# Altium PCB alpha_2.1.PcbDoc (part 1 of 2)
Units mil, origin at the board's own origin, x right, y up, seen from the top; angles counter-clockwise.
Board outline 3200 x 2100 mil, 6 copper layers (Component Side, Ground Plane (GND), Inner Layer 1, Inner Layer 2, Power Plane (VCC), Solder Side), stack 51.068 mil thick; 181 components, 149 nets, 637 pads, 303 vias.
Unrouted connection lines stored in the file: 8.
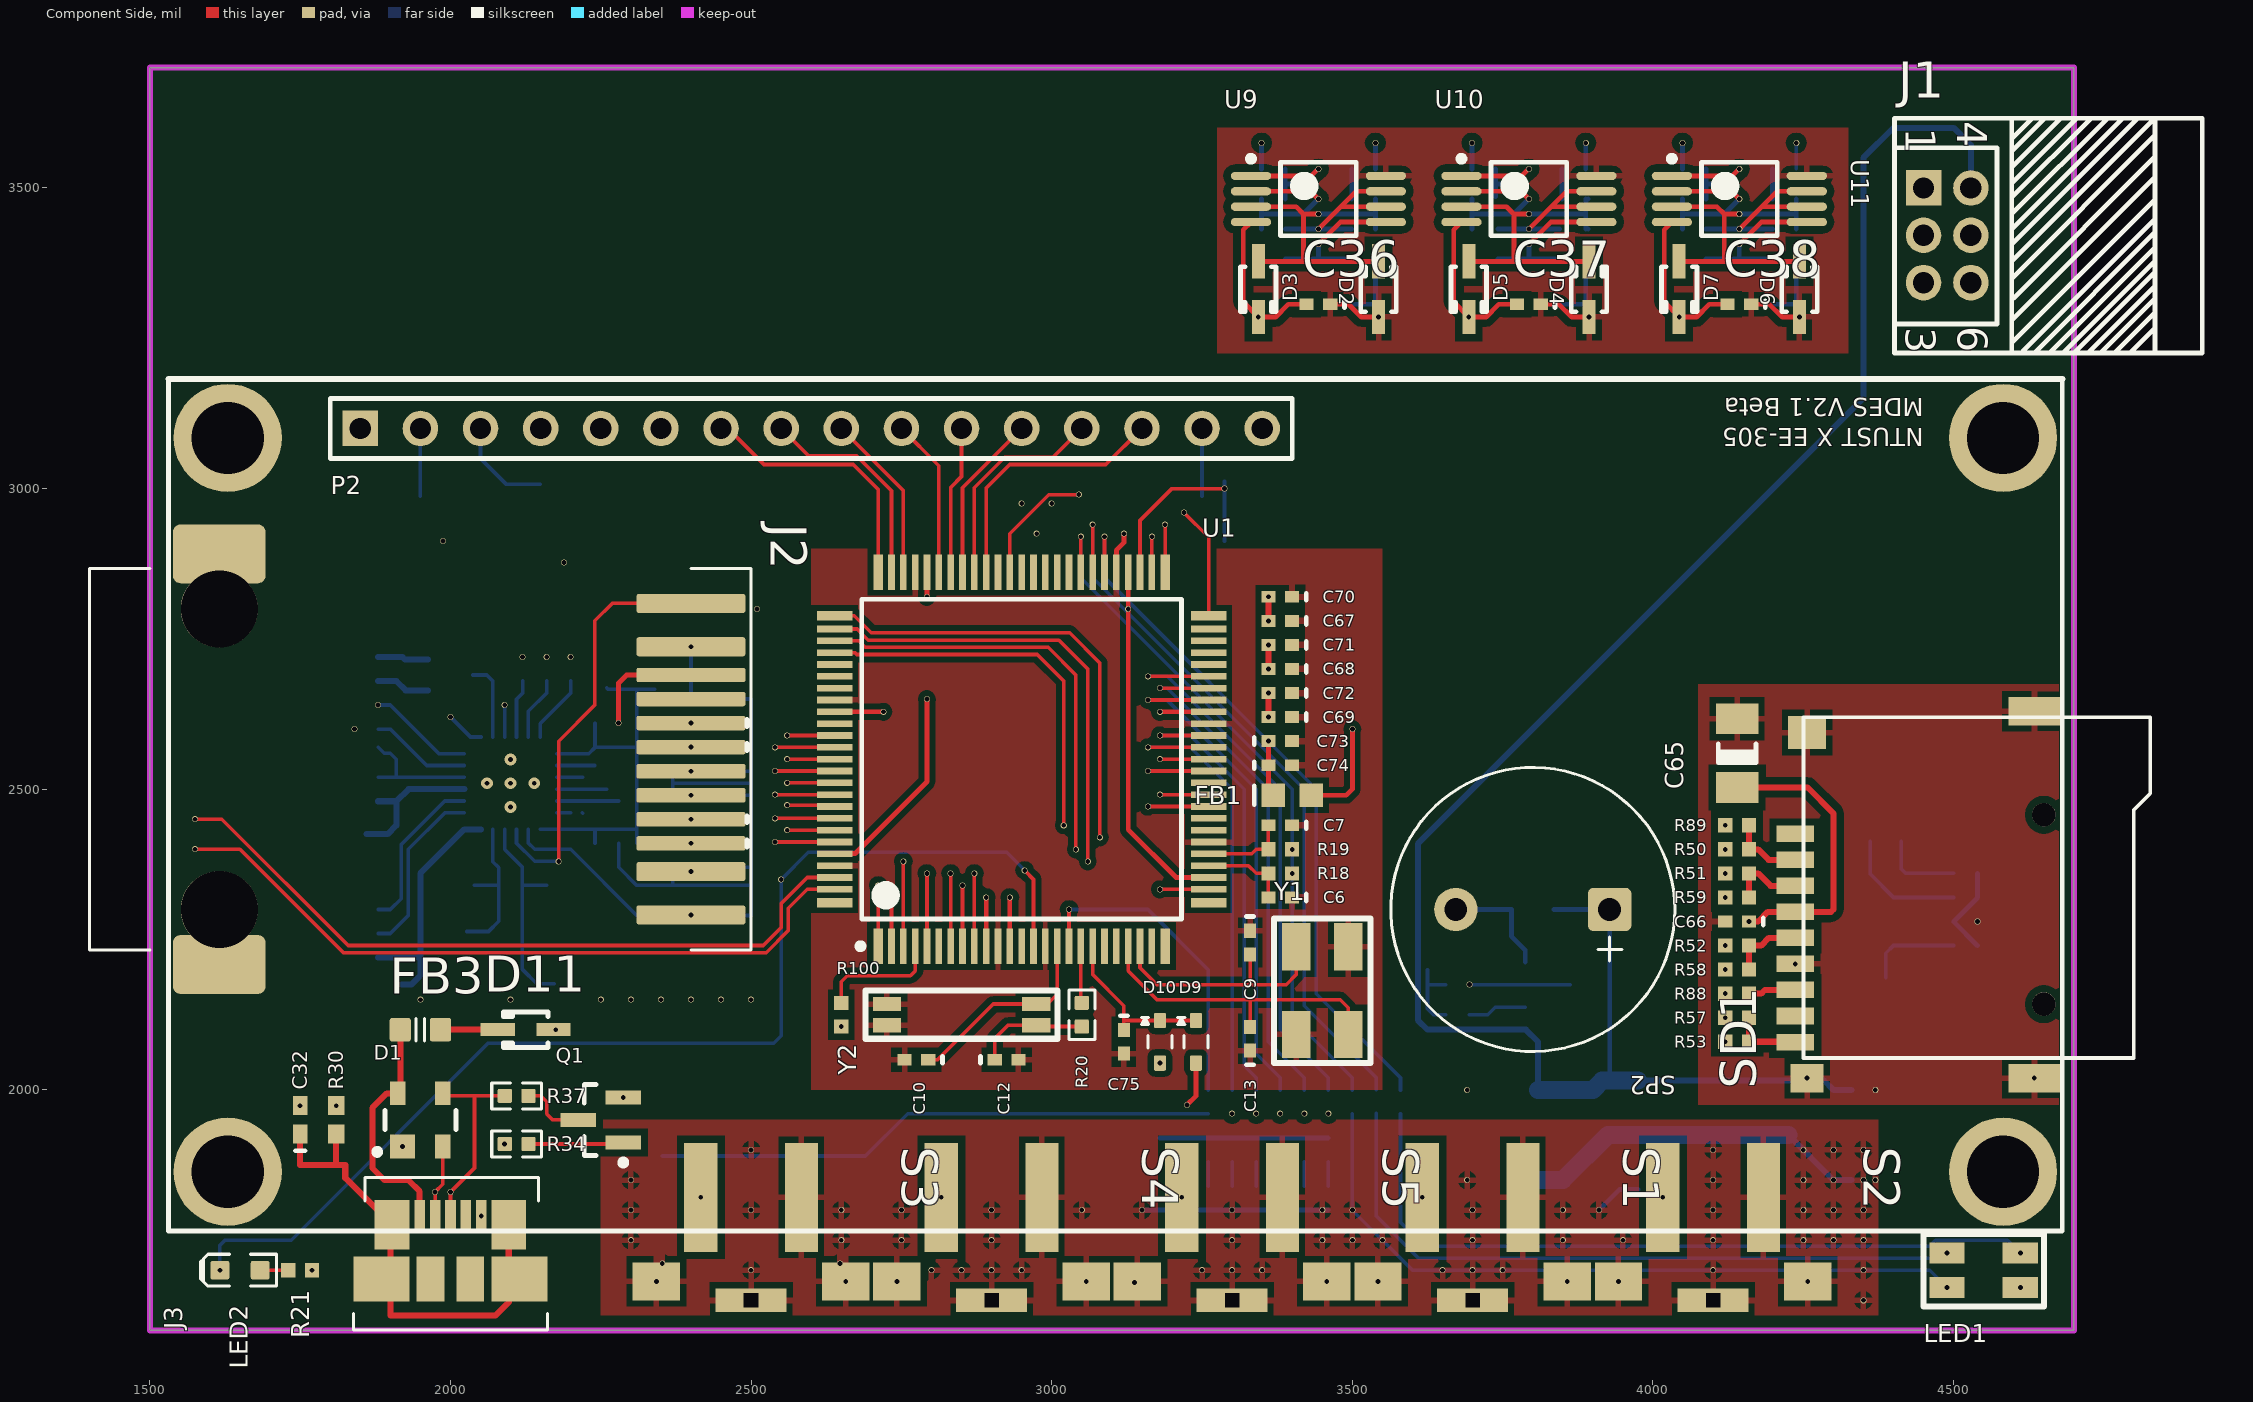
[diagram p0: Component Side view]
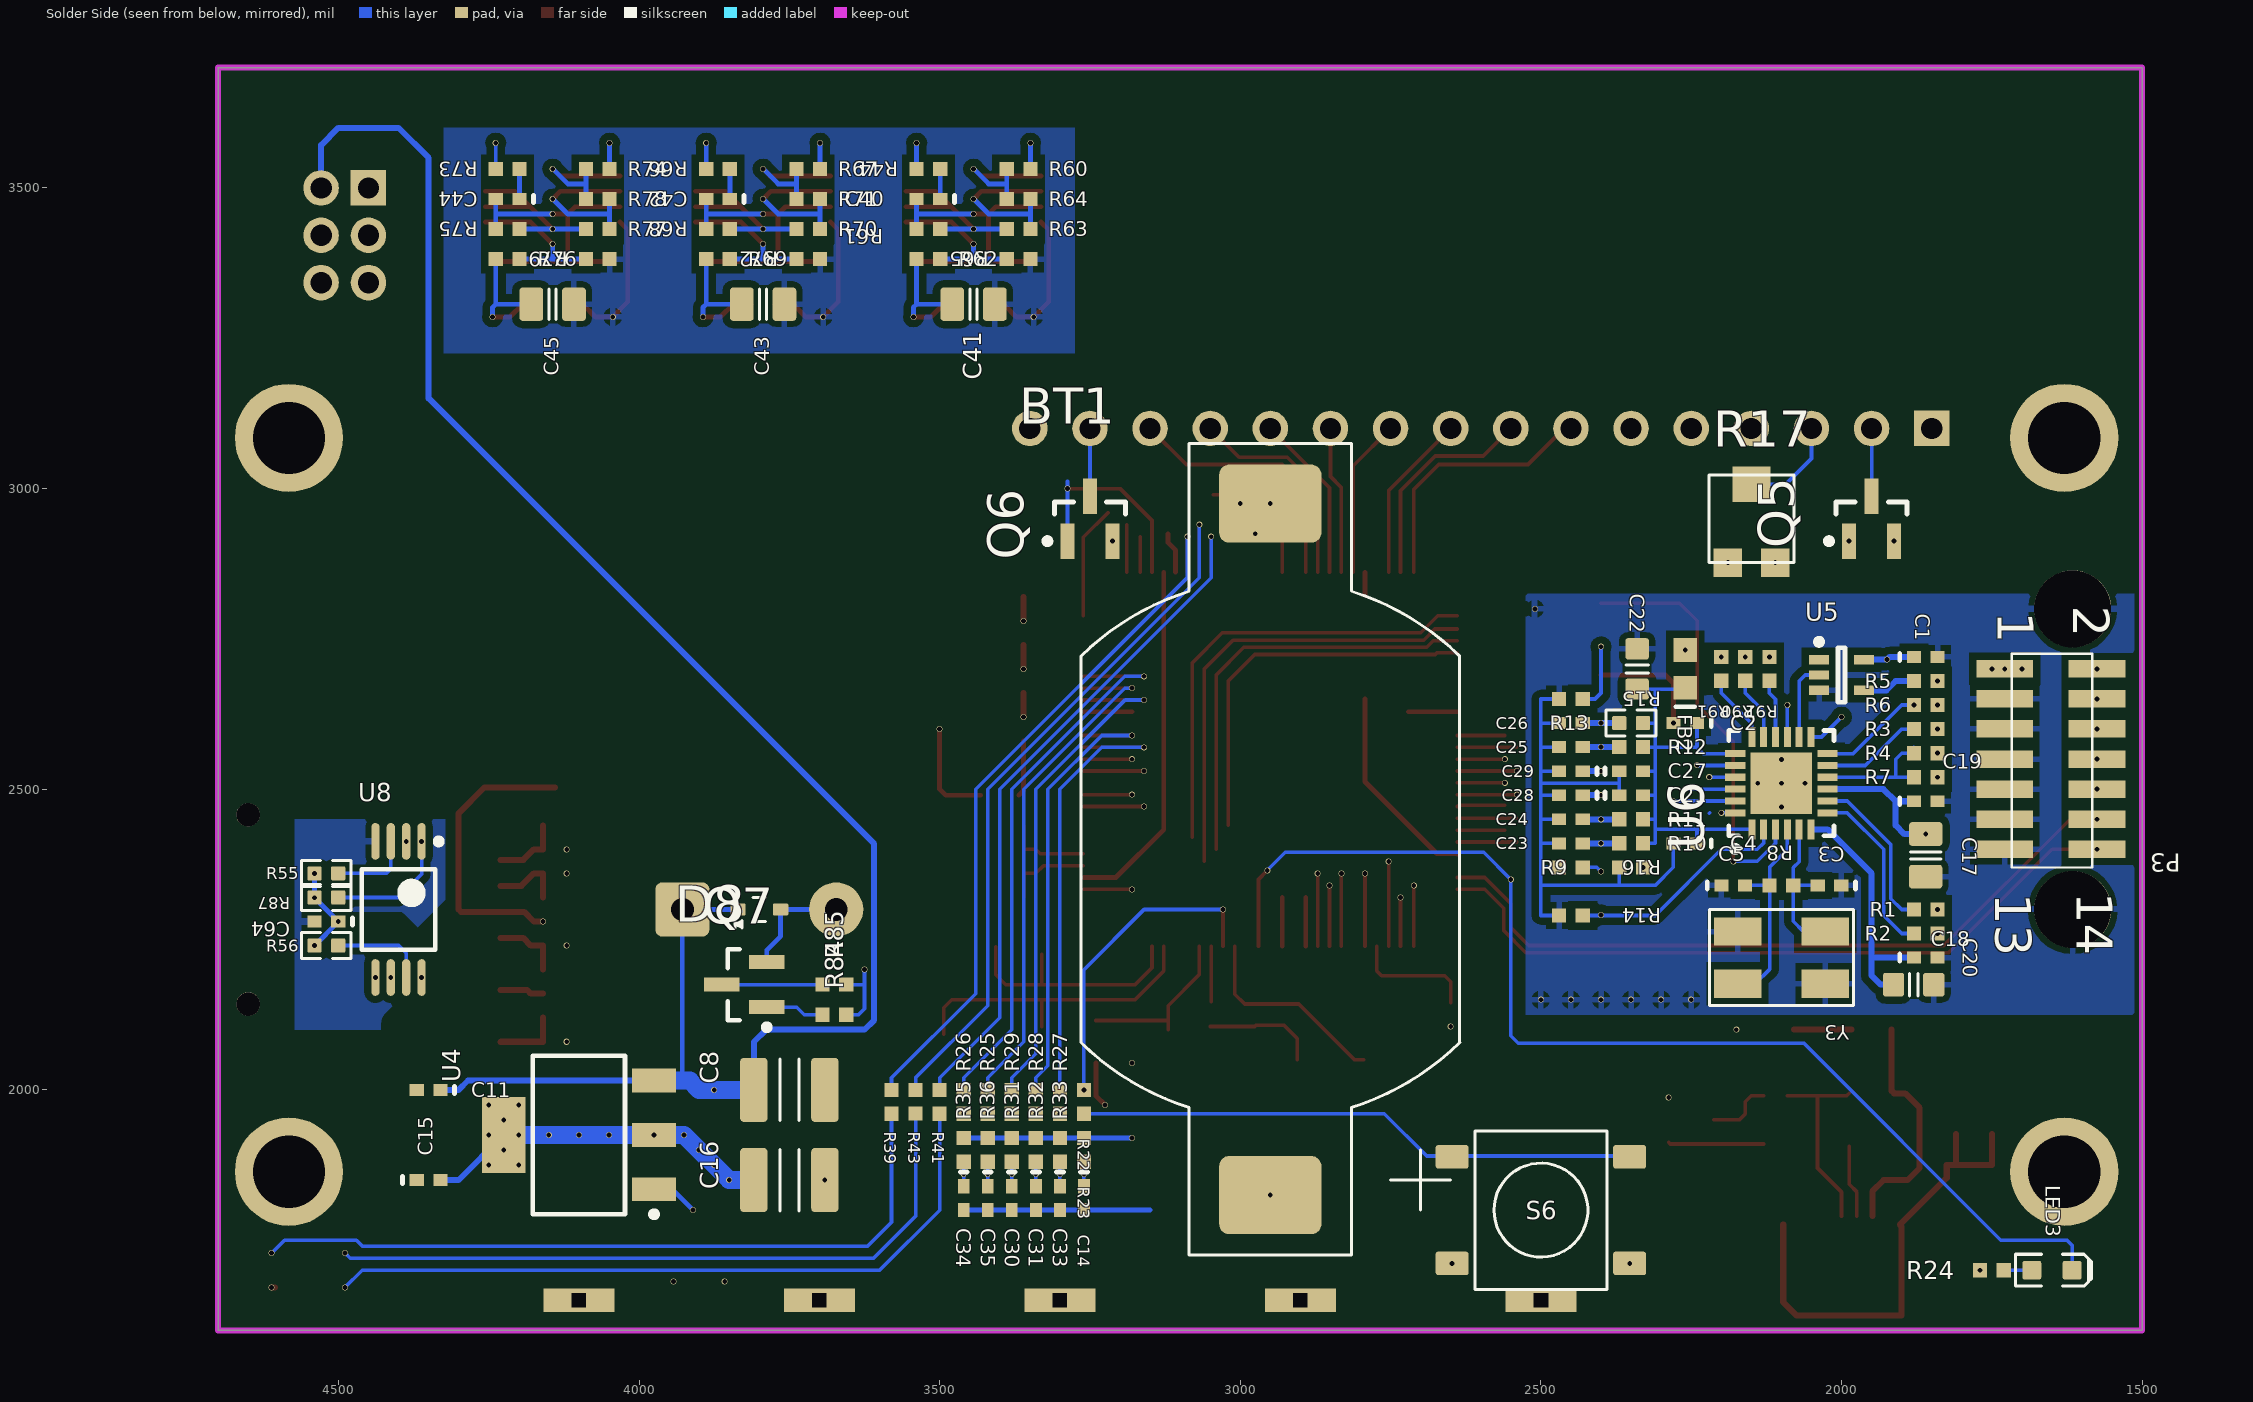
[diagram p1: Solder Side view, seen from below]
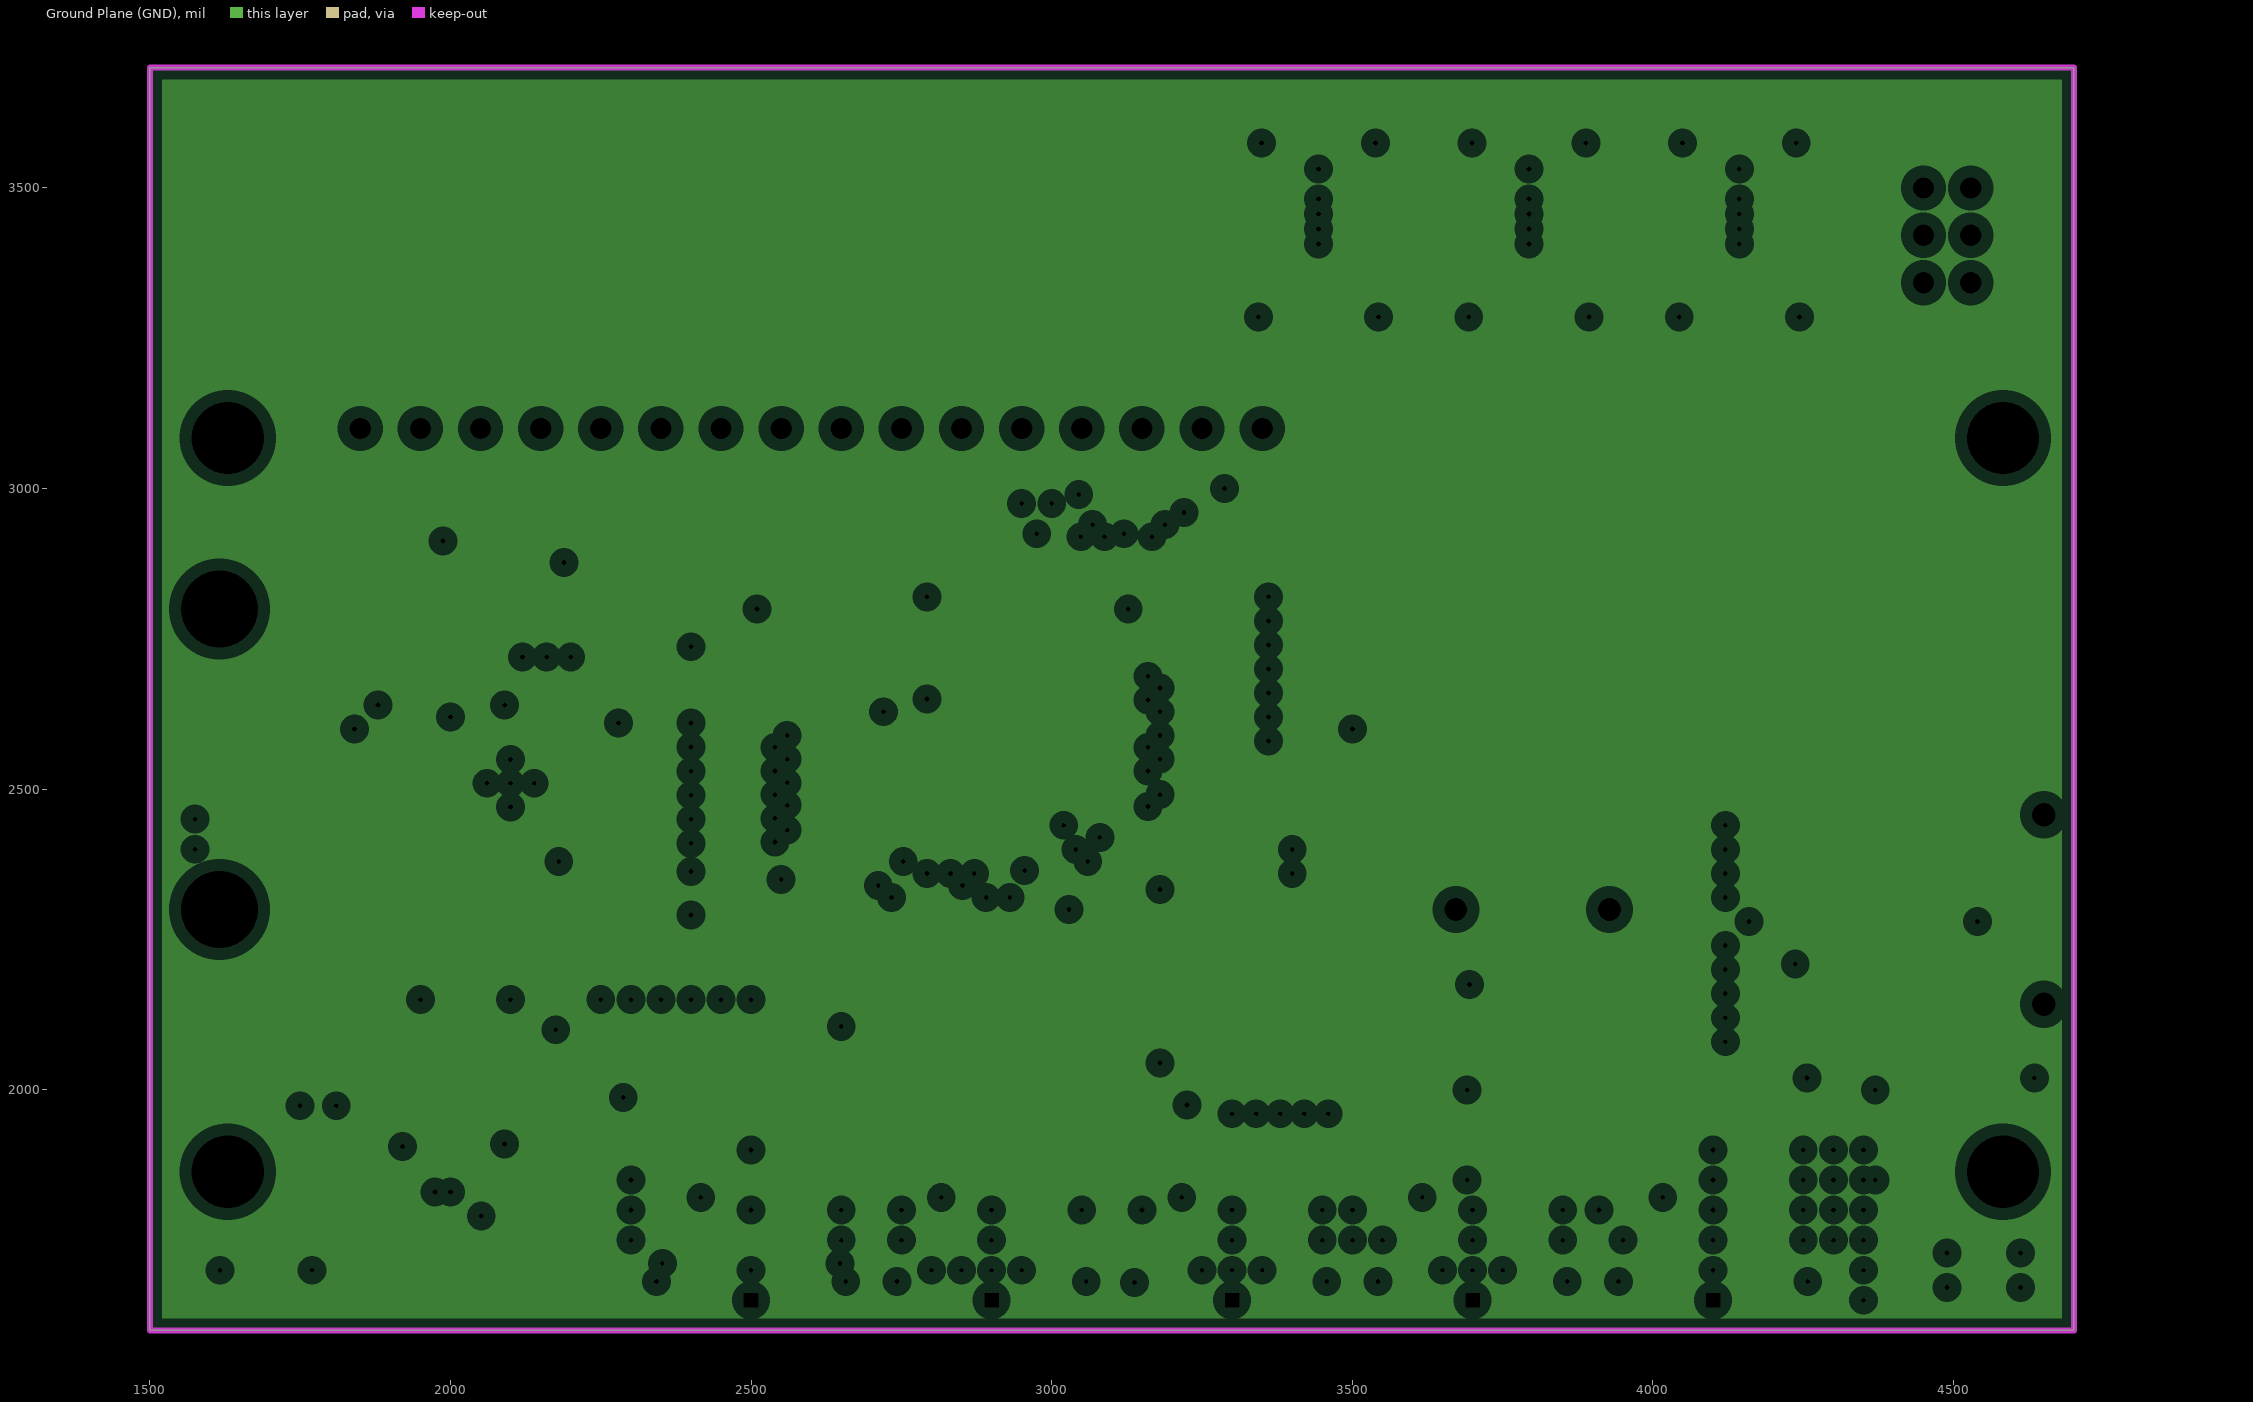
[diagram p2: Ground Plane (GND), clearances drawn from the general rule]
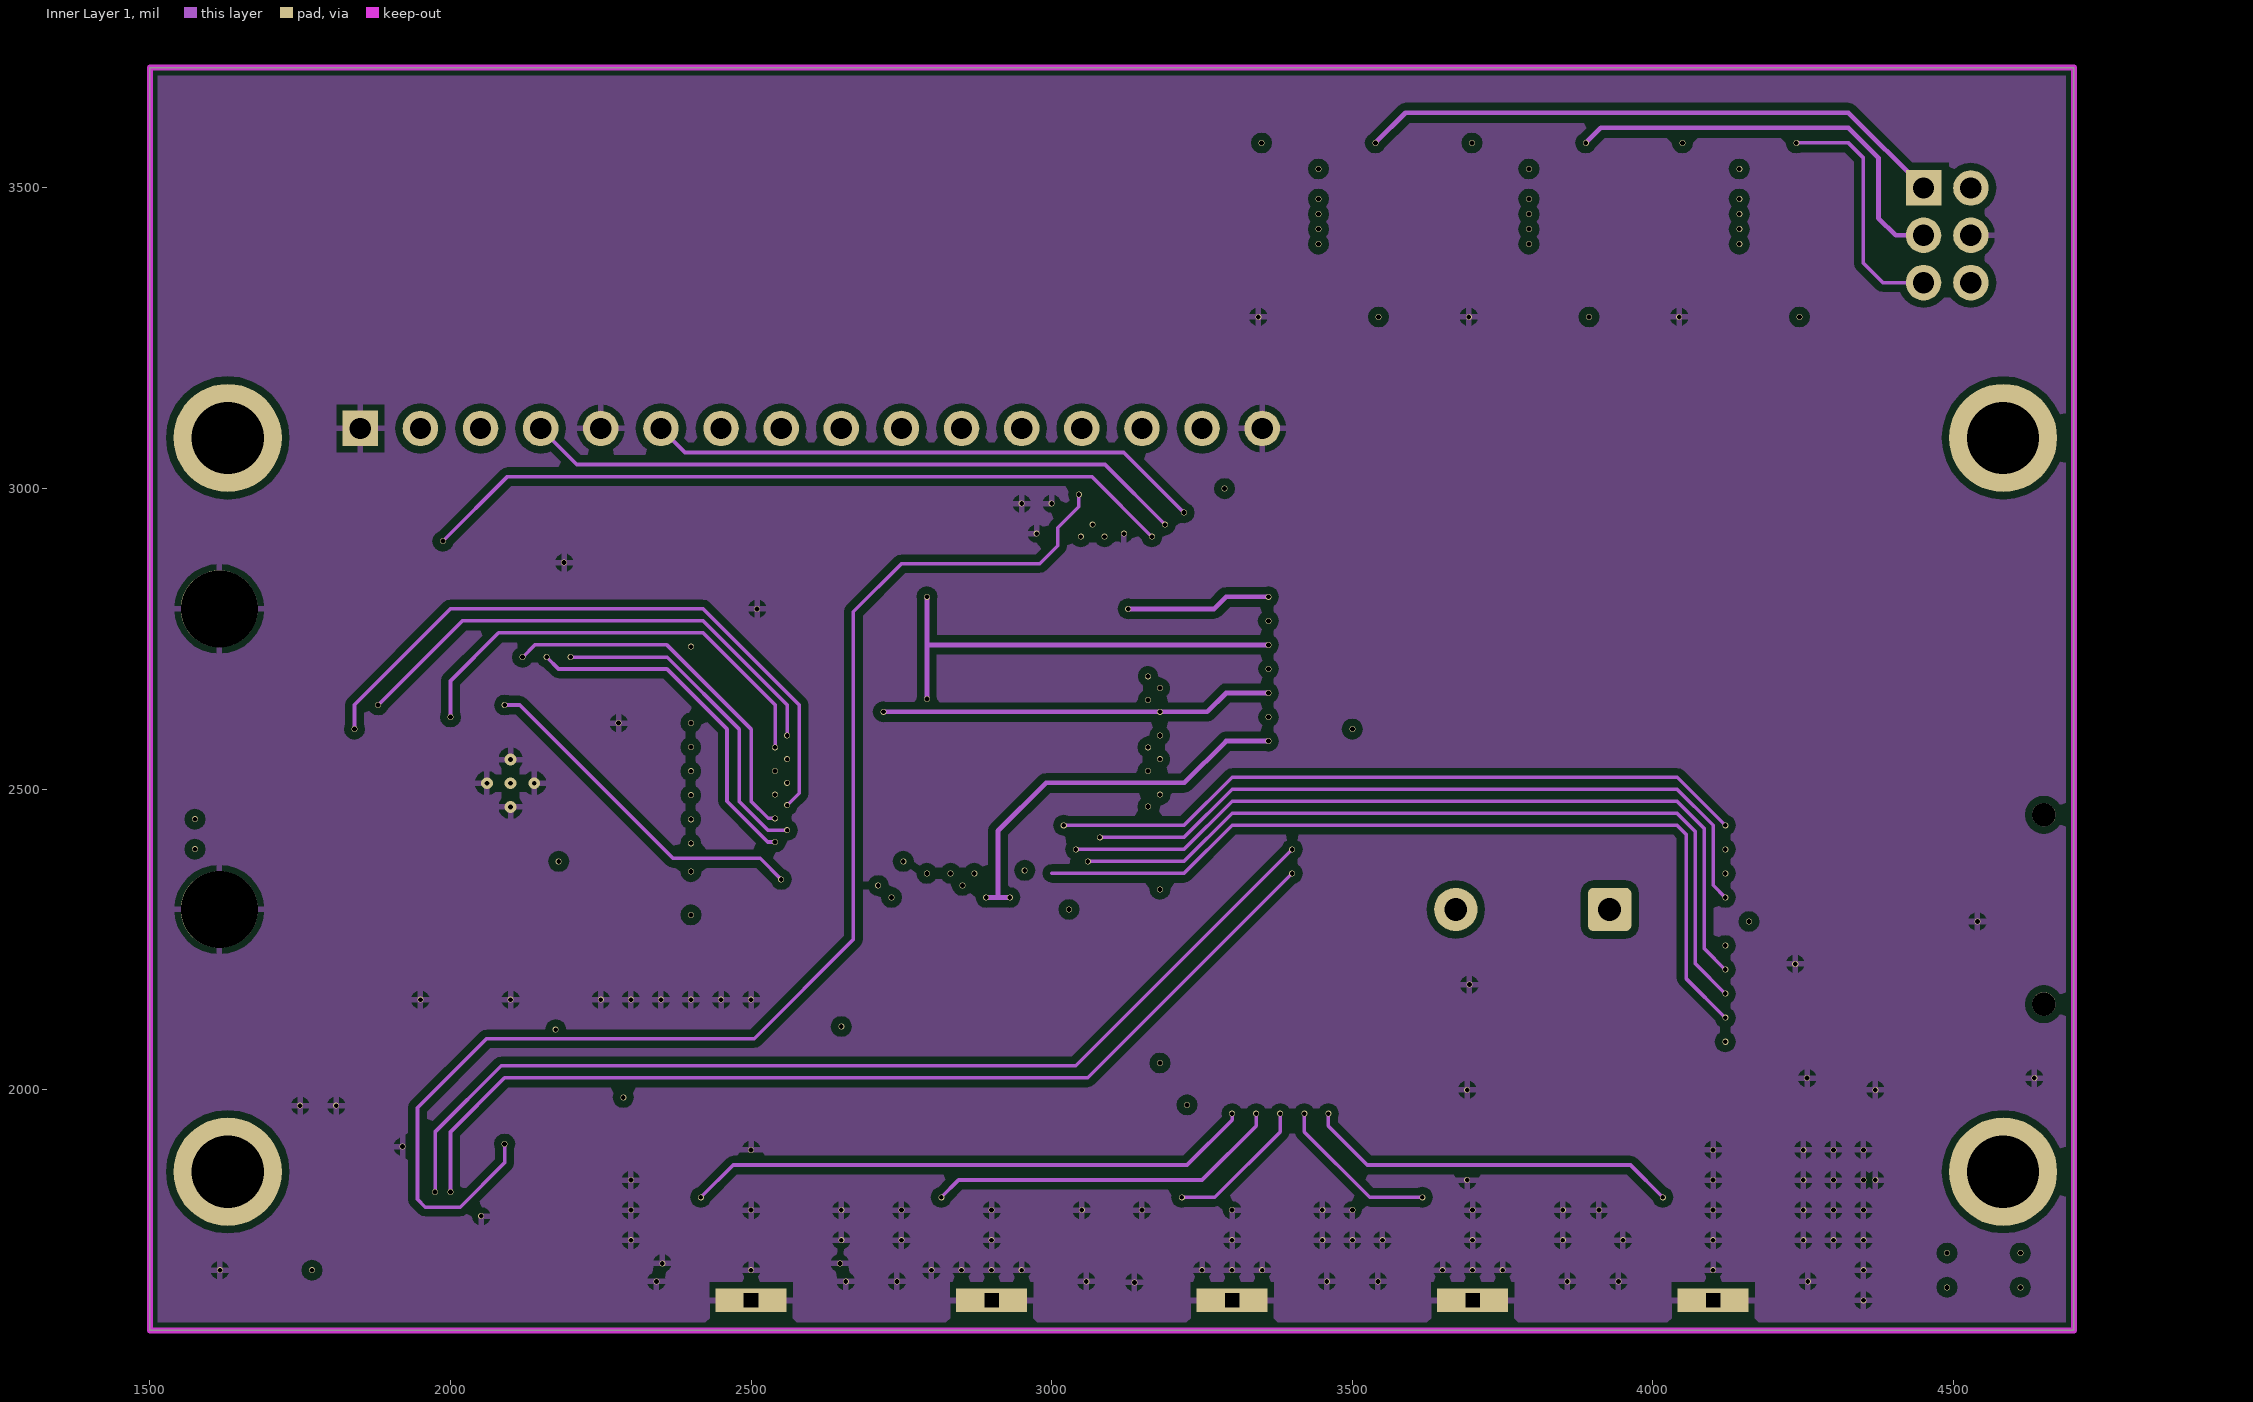
[diagram p3: Inner Layer 1]
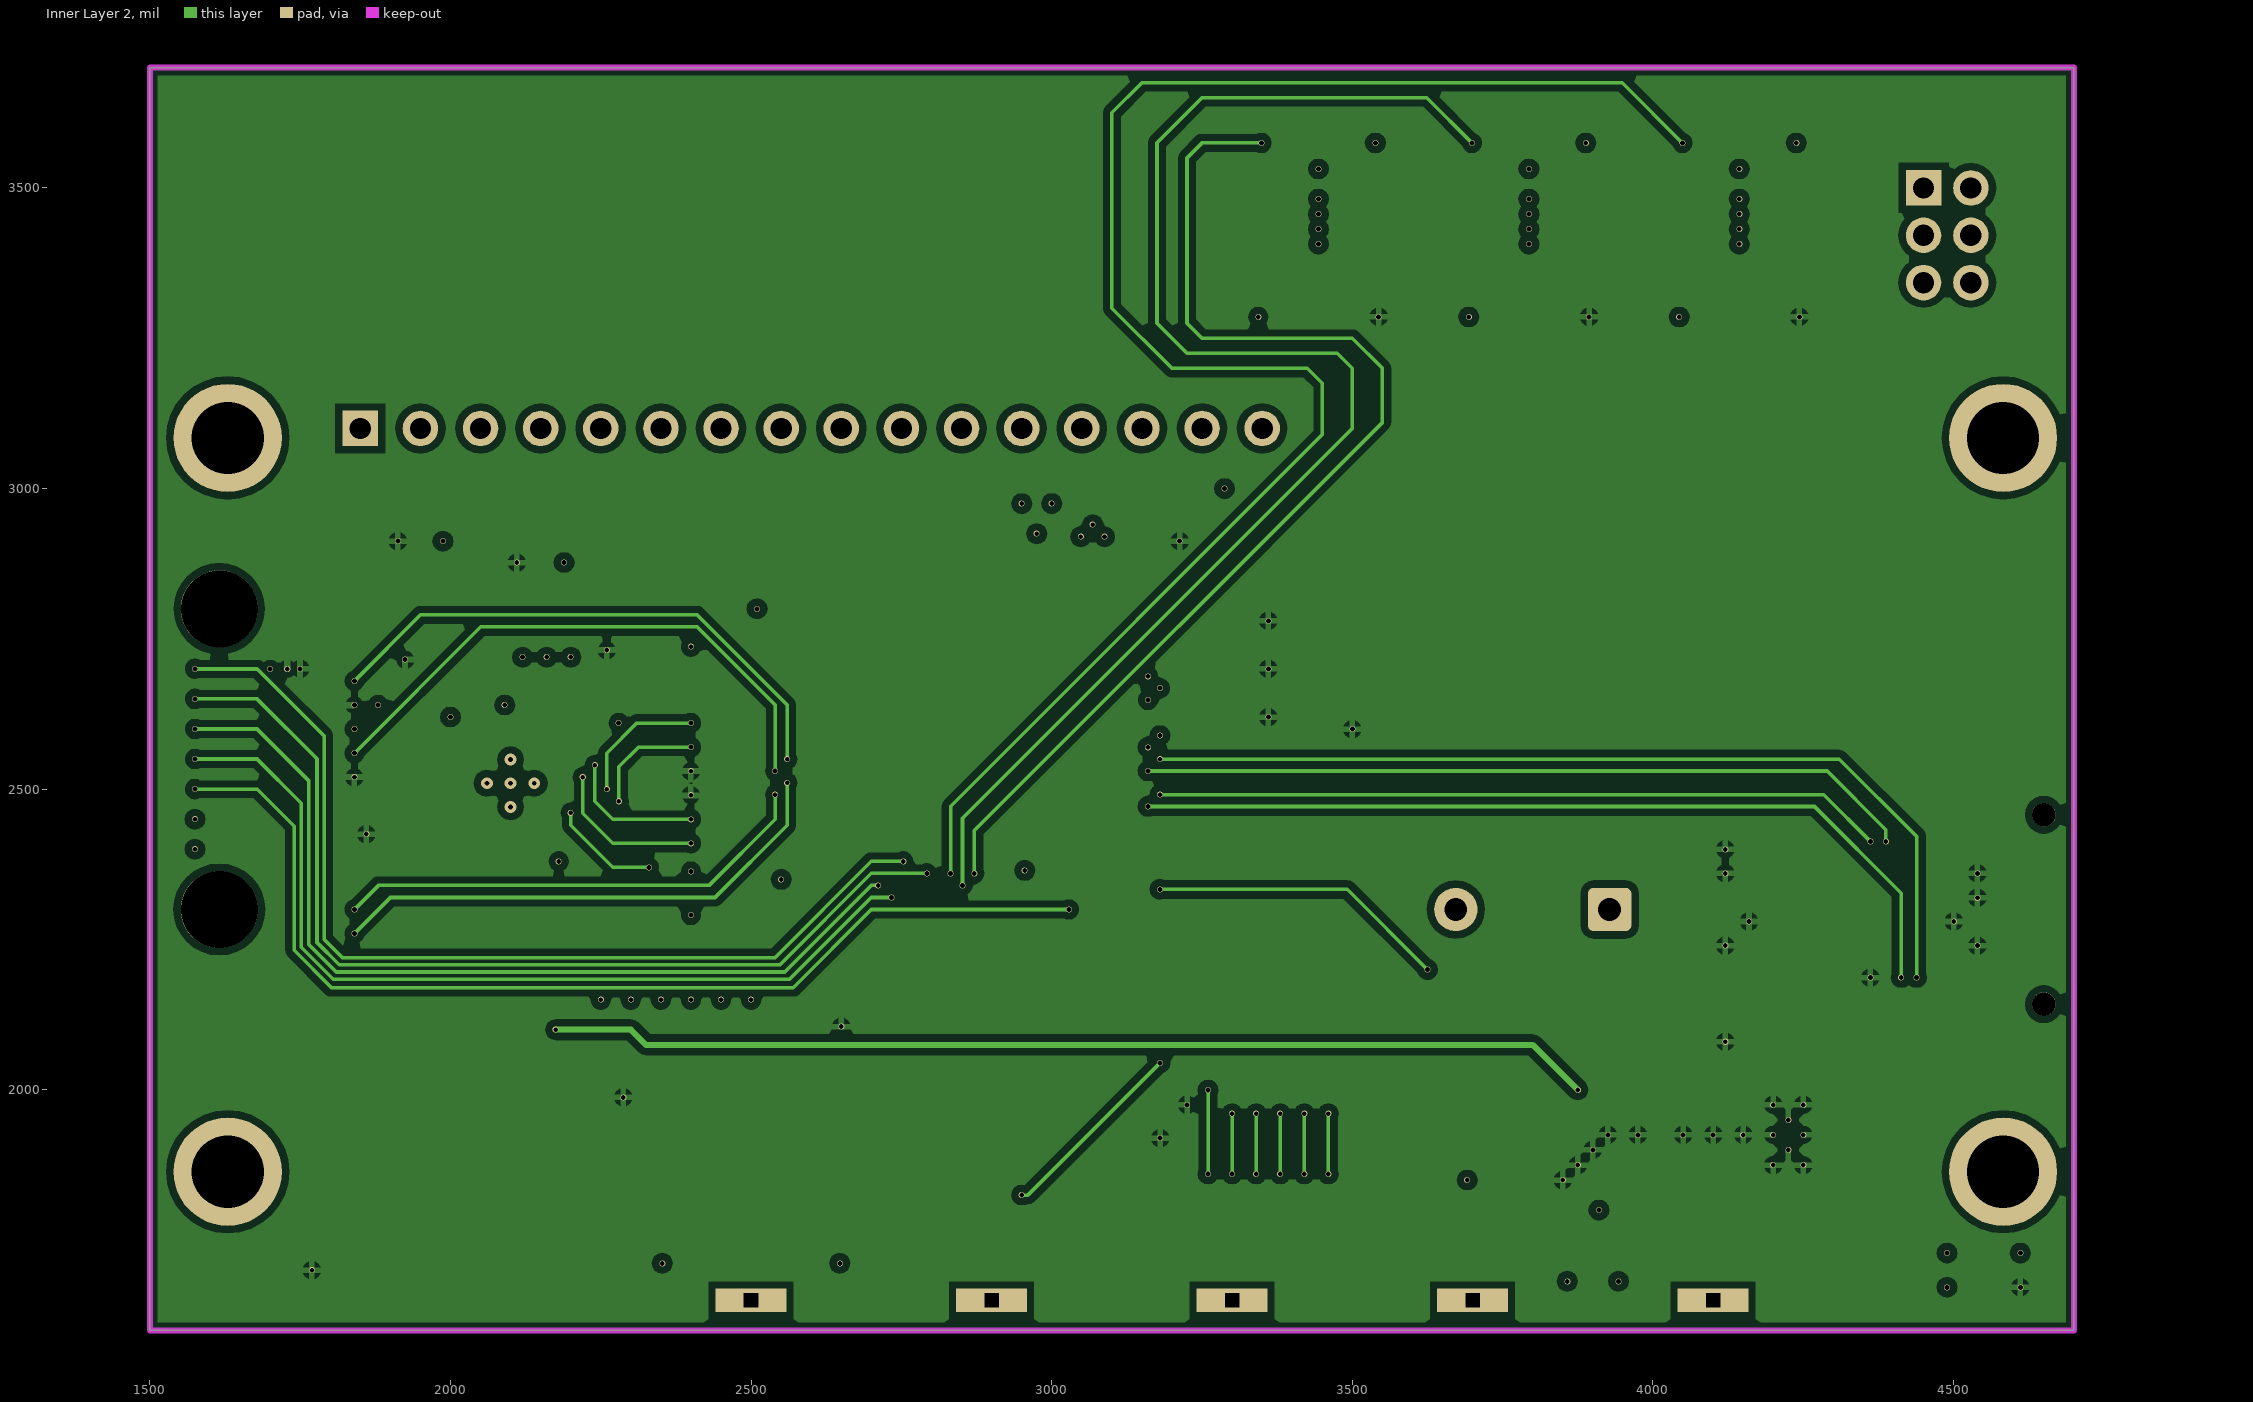
[diagram p4: Inner Layer 2]
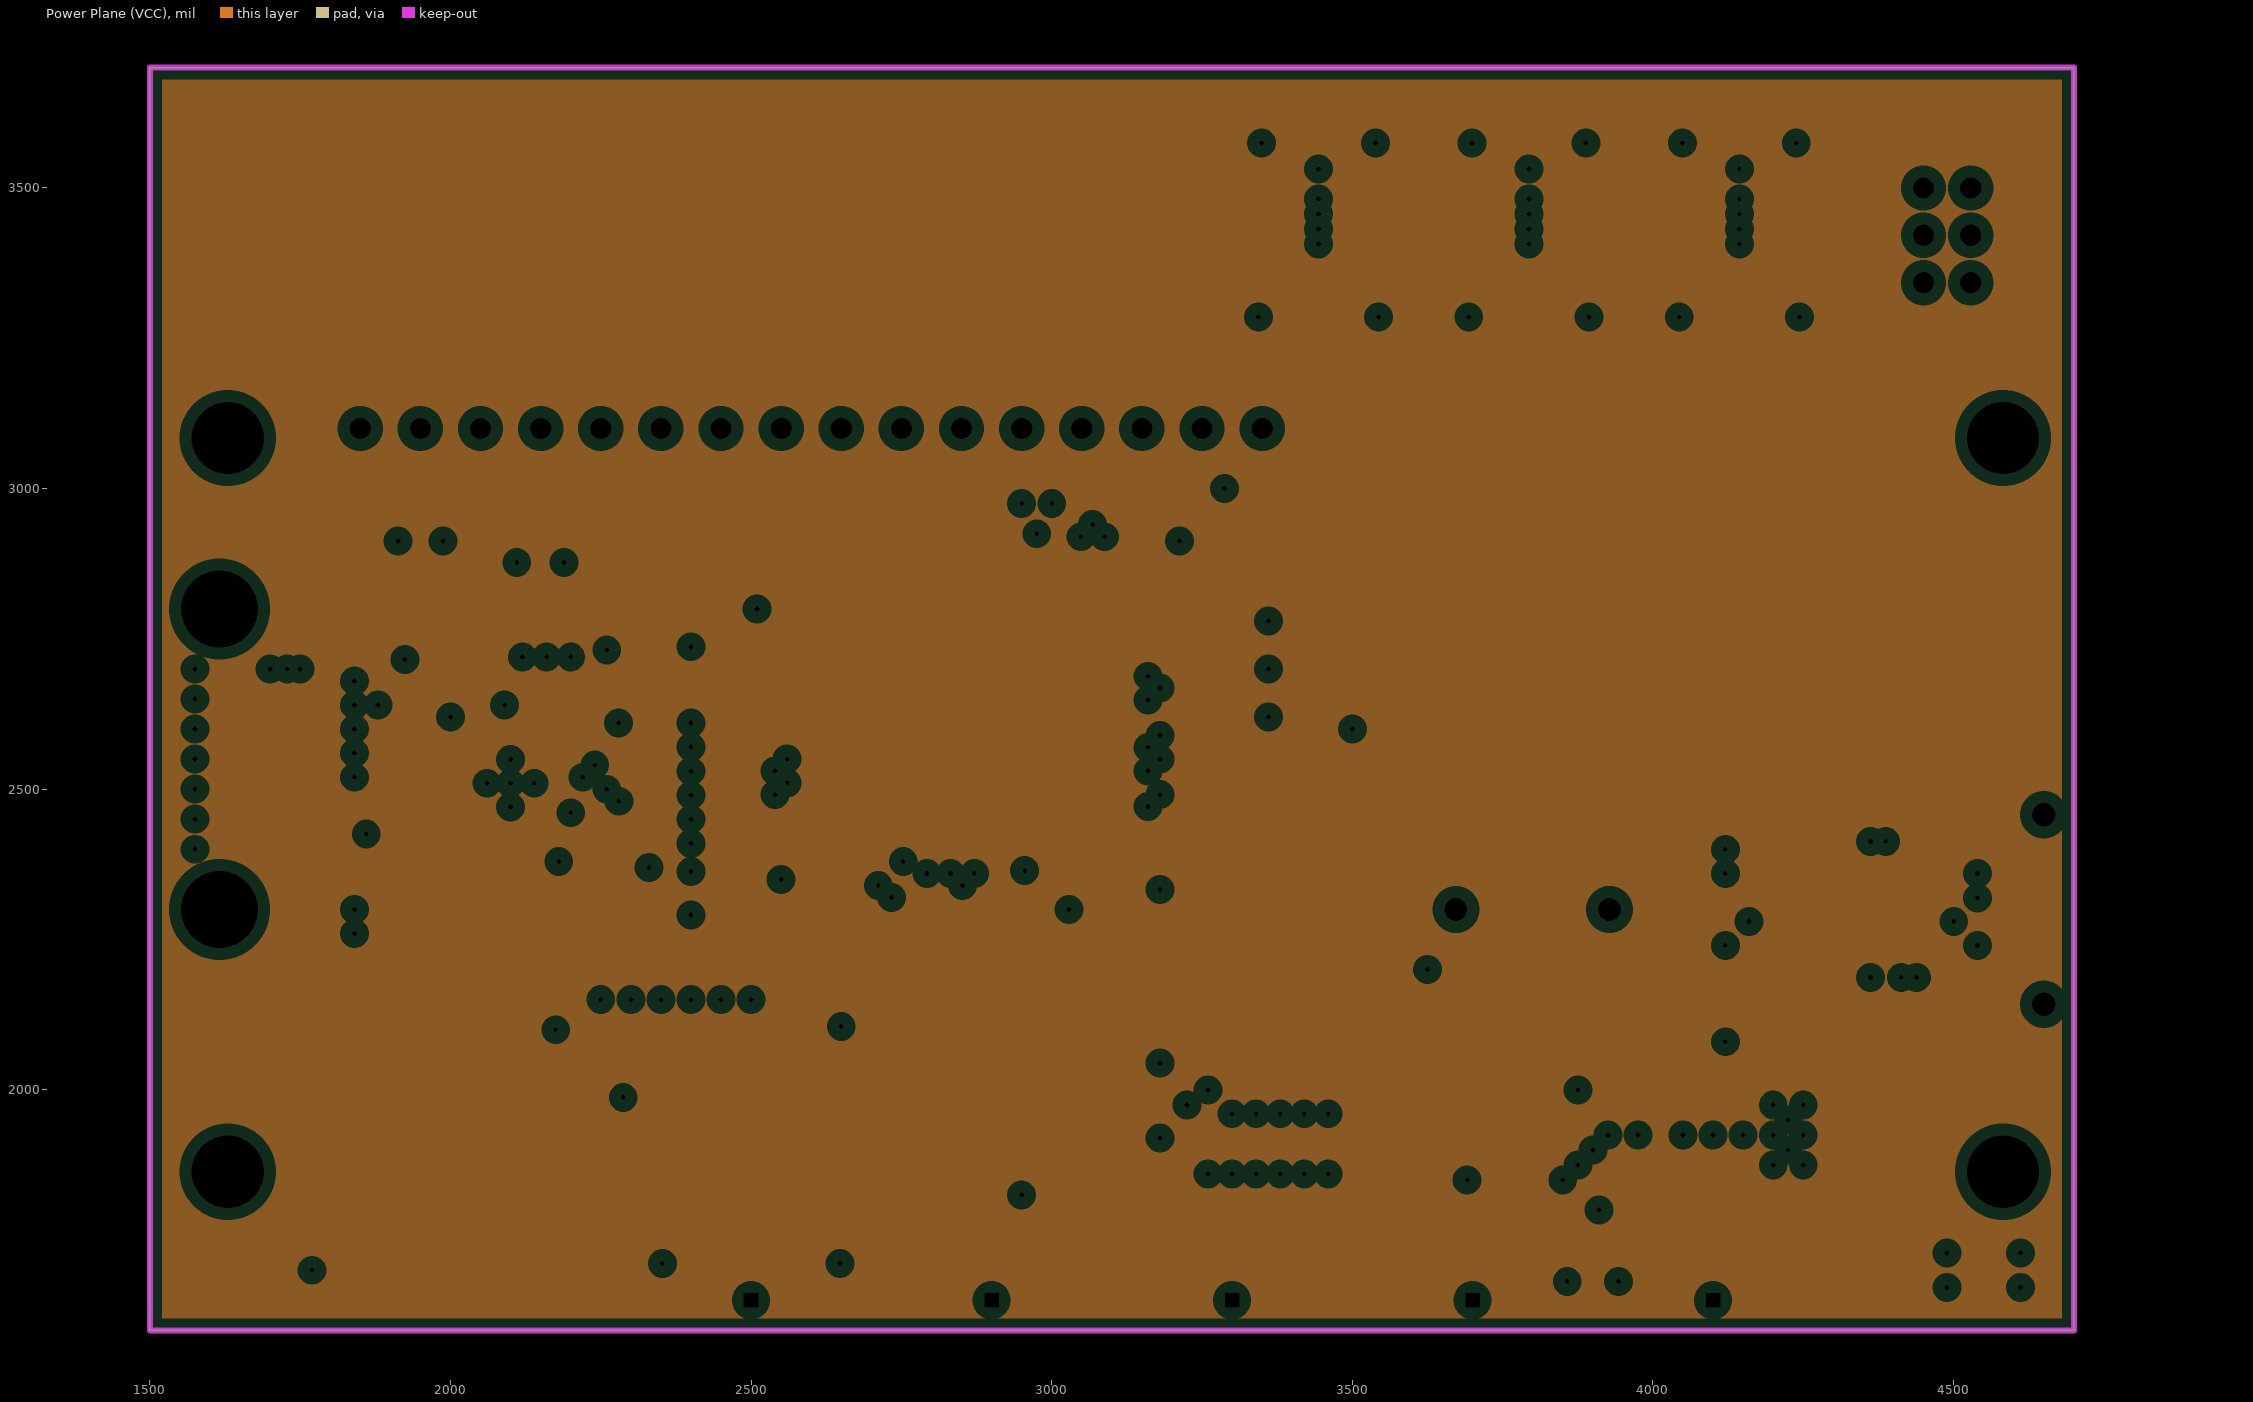
[diagram p5: Power Plane (VCC), clearances drawn from the general rule]

## Layer stack, top to bottom
Top Solder: solder mask 0.4, Solder Resist, Dk 3.5
Component Side: signal copper 1.4
Dielectric 1: core 12.6, FR-4, Dk 4.8
Ground Plane (GND): plane copper 1.417
Dielectric 3: prepreg 5, Dk 4.2
Inner Layer 1: signal copper 1.417
Dielectric 6: core 10, Dk 4.2
Inner Layer 2: signal copper 1.417
Dielectric 5: prepreg 5, Dk 4.2
Power Plane (VCC): plane copper 1.417
Dielectric 4: core 10, Dk 4.2
Solder Side: signal copper 1.4
Bottom Solder: solder mask 0.4, Solder Resist, Dk 3.5

## Board outline
1500,1600 4700,1600 4700,3700 1500,3700

## Design rules (kind name [scope] priority, off if disabled: settings)
Clearance Clearance_1 [OnLayer('Keep-Out Layer')] p1: gap=8
Clearance MCU [All vs (InNamedPolygon('MCU_GND'))] p2: gap=10
Clearance Polygon [InPolygon] p3: gap=12
Clearance [All] p4: gap=6
DiffPairsRouting [All] p1: maxlimit=10 minlimit=5 mostfreqgap=10 toplayer_minwidth=15 toplayer_maxwidth=15 toplayer_prefwidth=15 midlayer1_minwidth=15 midlayer1_maxwidth=15 midlayer1_prefwidth=15 midlayer2_minwidth=15 midlayer2_maxwidth=15 midlayer2_prefwidth=15 bottomlayer_minwidth=15 bottomlayer_maxwidth=15 bottomlayer_prefwidth=15 maxuncoupledlength=500
PlaneClearance [All] p1: clearance=20
PlaneConnect [All] p1: planeconnectstyle=Relief reliefexpansion=20 reliefentries=4 reliefconductorwidth=10 reliefairgap=10
PolygonConnect [All] p1: connectstyle=Relief reliefconductorwidth=10 reliefentries=4 polygonreliefangle="90 Angle" airgapwidth=10
RoutingVias [All] p1: holewidth=4 width=10 viastyle="Through Hole" minholewidth=4 minwidth=10 maxholewidth=4 maxwidth=10
SolderMaskExpansion [All] p1: expansion=4
UnpouredPolygon [All] p1: allowunpoured=TRUE allowshelved=TRUE
Width VCC [InNet('GND')  Or InNet('3V3')] p1: maxlimit=60 minlimit=6 preferedwidth=40 midlayer1_minwidth=8 midlayer2_minwidth=8 minimp=50.000000 maximp=50.000000 favimp=50.000000
Width [All] p2: maxlimit=50 minlimit=6 preferedwidth=10 midlayer1_maxwidth=10 midlayer1_prefwidth=8 midlayer2_maxwidth=10 midlayer2_prefwidth=8 minimp=50.000000 maximp=50.000000 favimp=50.000000
26 further rules are at their usual default settings.

## Classes and differential pairs
component class "SPI peripherals": C64 C65 C66 R50 R51 R52 R53 R55 R56 R57 R58 R59 R87 R88 R89 SD1 U8
component class LPC1769: BT1 C6 C7 C8 C9 C10 C11 C12 C13 C14 C15 C16 C67 C68 C69 C70 C71 C72 C73 C74 C75 D9 D10 FB1 LED2 LED3 P3 R18 R19 R20 R21 R22 R23 R24 R100 S6 U1 U4 Y1 Y2
component class Etherent: C1 C2 C3 C4 C5 C17 C18 C19 C20 C21 C22 C23 C24 C25 C26 C27 C28 C29 D*1 FB2 J2 R1 R2 R3 R4 R5 R6 R7 R8 R9 R10 R11 R12 R13 R14 R15 R16 R90 R91 R92 U5 U6 Y3
component class "Direct Digital IO": C30 C31 C32 C33 C34 C35 D1 D11 FB3 J3 LED1 Q1 R25 R26 R27 R28 R29 R30 R31 R32 R33 R34 R35 R36 R37 R39 R41 R43 S1 S2 S3 S4 S5
component class analog: C36 C37 C38 C40 C41 C42 C43 C44 C45 D2 D3 D4 D5 D6 D7 J1 R44 R60 R61 R62 R63 R64 R65 R66 R67 R68 R69 R70 R71 R72 R73 R74 R75 R76 R77 R78 R79 U9 U10 U11
component class Speaker: D8 Q7 R84 R85 SP2
component class LCD: P2 Q5 Q6 R17

## Components (designator, comment, footprint, x,y, rotation, side; value= is the part's Value field where it differs from the comment)
BT1 "Battery" BU2032SM 2950,2400 r90 bottom locked
C1 "100n" CAPC1005L#1 1860,2720 r180 bottom
C2 "100n" CAPC1005L#1 2260,2610 r0 bottom
C3 "18p" CAPC1005L#1 2020,2340 r0 bottom
C4 "100n" CAPC1005L#1 2260,2410 r0 bottom
C5 "18p" CAPC1005L#1 2180,2340 r180 bottom
C6 "18p" CAPC1005L#1 3380,2320 r180 top
C7 "18p" CAPC1005L#1 3380,2440 r180 top
C8 "Value" CAPC3225N 3750,2000 r180 bottom
C9 "18p" CAPC1005L#1 3330,2245 r270 top
C10 "5p" CAPC1005L#1 2775,2050 r180 top
C11 "100nF" CAPC1005L#1 4350,2000 r0 bottom
C12 "5p" CAPC1005L#1 2925,2050 r0 top
C13 "18p" CAPC1005L#1 3330,2085 r90 top
C14 "approved sub OK" CAPC1005L#1 3260,1820 r270 bottom
C15 "100nF" CAPC1005L#1 4350,1850 r180 bottom
C16 "Value" CAPC3225N 3750,1850 r180 bottom
C17 "10u" CAPC2012N 1860,2390 r270 bottom
C18 "1u" CAPC1608N#1 1880,2175 r180 bottom
C19 "100n" CAPC1005L#1 1860,2480 r180 bottom
C20 "100n" CAPC1005L#1 1860,2220 r180 bottom
C21 "100n" CAPC1005L#1 2350,2490 r180 bottom
C22 "10u" CAPC1608N#1 2340,2700 r90 bottom
C23 "18p" CAPC1005L#2 2450,2410 r0 bottom
C24 "18p" CAPC1005L#2 2450,2450 r0 bottom
C25 "18p" CAPC1005L#2 2450,2570 r0 bottom
C26 "18p" CAPC1005L#2 2450,2610 r0 bottom
C27 "100n" CAPC1005L#1 2350,2530 r180 bottom
C28 "100n" CAPC1005L#1 2450,2490 r0 bottom
C29 "100n" CAPC1005L#1 2450,2530 r0 bottom
C30 "100nF" CAPC1005L#1 3380,1820 r270 bottom
C31 "100nF" CAPC1005L#1 3340,1820 r270 bottom
C32 "approved sub OK" CAPC1005N 1750,1950 r90 top
C33 "100nF" CAPC1005L#1 3300,1820 r270 bottom
C34 "100nF" CAPC1005L#1 3460,1820 r270 bottom
C35 "100nF" CAPC1005L#1 3420,1820 r270 bottom
C36 "100n" CAPC1005L#1 3443.61,3306.67 r180 top
C37 "100n" CAPC1005L#1 3793.61,3306.67 r180 top
C38 "100n" CAPC1005L#1 4143.61,3306.67 r180 top
C40 "Cap" CAPC1005L#1 3518.61,3481.67 r0 bottom
C41 "10u" CAPC2012N 3443.61,3306.67 r180 bottom
C42 "Cap" CAPC1005L#1 3868.61,3481.67 r0 bottom
C43 "10u" CAPC2012N 3793.61,3306.67 r180 bottom
C44 "Cap" CAPC1005L#1 4218.61,3481.67 r0 bottom
C45 "10u" CAPC2012N 4143.61,3306.67 r180 bottom
C64 "100nF" CAPC1005L#1 4520,2280 r0 bottom
C65 "Value" CAPC3216N 4140,2560 r90 top
C66 "100nF" CAPC1005L#1 4140,2280 r180 top
C67 "100nF" CAPC1005L#1 3380,2780 r180 top
C68 "100nF" CAPC1005L#1 3380,2700 r180 top
C69 "100nF" CAPC1005L#1 3380,2620 r180 top
C70 "10n" CAPC1005L#1 3380,2820 r180 top
C71 "10n" CAPC1005L#1 3380,2740 r180 top
C72 "10n" CAPC1005L#1 3380,2660 r180 top
C73 "100nF" CAPC1005L#1 3380,2580 r0 top
C74 "10n" CAPC1005L#1 3380,2540 r0 top
C75 "100nF" CAPC1005L#1 3120,2080 r270 top
D1 "PRTR5V0U2X" SOT190P230X120-4N 1950,1950 r90 top
D2 "4448" SOD323 3543.61,3331.67 r90 top
D3 "4448" SOD323 3343.61,3331.67 r270 top
D4 "4448" SOD323 3893.61,3331.67 r90 top
D5 "4448" SOD323 3693.61,3331.67 r270 top
D6 "4448" SOD323 4243.61,3331.67 r90 top
D7 "4448" SOD323 4043.61,3331.67 r270 top
D8 "4448" SOD523F 3800,2300 r180 bottom
D9 "4448" SOD523F 3240,2080 r270 top
D10 "4448" SOD523F 3180,2080 r270 top
D11 "4448" SOD323 2125,2100 r180 top
FB1 "Thick Film" CAPC1608N#2 3400,2490 r0 top
FB2 "Thick Film" CAPC1608N#2 2260,2700 r90 bottom
FB3 "Thick Film" CAPC1608N#1 1950,2100 r180 top
J1 "2X6du pont-2.0mm-6line to 90der" "HDR2X3 - duplicate-6-line 90 der" 4450,3500 r270 top
J2 "J3011G21DNL" J3011G21DNL 1900,2550 r270 top locked
J3 "USB_Mico-B" USB_micoi-B_Molex_SMT 2000,1600 r90 top (schematic designator J1)
LED1 "LED_RGB" 4-PLCC 4550,1700 r270 top
LED2 "Green" LED-0603-GREEN 1650,1700 r180 top
LED3 "Red" LED-0603-GREEN 1650,1700 r180 bottom
P2 "Header 16" HDR1X16 1850,3100 r0 top
P3 "Header 7X2" "Header 7X2-1.27" 1650,2550 r270 bottom
Q1 "BCX17" SOT23-3N 2250,1950 r180 top (schematic designator Q2)
Q5 "MOSFET-P" SOT23-3N 1950,2950 r90 bottom
Q6 "MOSFET-P" SOT23-3N 3250,2950 r90 bottom
Q7 "BCX17" SOT23-3N 3825,2175 r0 bottom
R1 "22R" RESC1005L#1 1860,2300 r0 bottom
R2 "22R" RESC1005L#1 1860,2260 r0 bottom
R3 "22R" RESC1005L#1 1860,2600 r0 bottom
R4 "22R" RESC1005L#1 1860,2560 r0 bottom
R5 "22R" RESC1005L#1 1860,2680 r0 bottom
R6 "1K5" RESC1005L#1 1860,2640 r0 bottom
R7 "10K" RESC1005L#1 1860,2520 r0 bottom
R8 "1M" RESC1005L#1 2100,2340 r0 bottom
R9 "12K1" RESC1005L#1 2350,2370 r180 bottom
R10 "50R" RESC1005L#2 2350,2410 r180 bottom
R11 "50R" RESC1005L#2 2350,2450 r180 bottom
R12 "50R" RESC1005L#2 2350,2570 r180 bottom
R13 "Thick Film" RESC1005N#1 2350,2610 r0 bottom
R14 "10K" RESC1005L#1 2450,2290 r0 bottom
R15 "270R" RESC1005L#1 2450,2650 r180 bottom
R16 "270R" RESC1005L#1 2450,2370 r180 bottom
R17 "RES_TRIMMER_10K_5T_SMD" RES_TRIMMER_SMD_TC33X1 2150,2950 r180 bottom
R18 "33R" RESC1005L#1 3380,2360 r0 top
R19 "Thick Film" RESC1005L#1 3380,2400 r0 top
R20 "100k" RESC1005N#1 3050,2125 r90 top
R21 "680R" RESC1005L#1 1750,1700 r0 top
R22 "100R" RESC1005L#1 3260,1980 r270 bottom
R23 "100K" RESC1005L#1 3260,1900 r90 bottom
R24 "470R" RESC1005l 1750,1700 r0 bottom
R25 "270R" RESC1005L#1 3420,1980 r90 bottom
R26 "270R" RESC1005L#1 3460,1980 r270 bottom
R27 "270R" RESC1005L#1 3300,1980 r270 bottom
R28 "270R" RESC1005L#1 3340,1980 r270 bottom
R29 "270R" RESC1005L#1 3380,1980 r90 bottom
R30 "Thick Film" RESC1005N#2 1810,1950 r270 top
R31 "10K" RESC1005L#1 3380,1900 r270 bottom
R32 "10K" RESC1005L#1 3340,1900 r270 bottom
R33 "10K" RESC1005L#1 3300,1900 r270 bottom
R34 "3k" RESC1005N#1 2110,1910 r180 top
R35 "10K" RESC1005L#1 3460,1900 r270 bottom
R36 "10K" RESC1005L#1 3420,1900 r270 bottom
R37 "Thick Film" RESC1005N#1 2110,1990 r180 top
R39 "680" RESC1005L#1 3580,1980 r270 bottom
R41 "680" RESC1005L#1 3500,1980 r90 bottom
R43 "680" RESC1005L#1 3540,1980.31 r90 bottom
R44 "750K" RESC1005L#1 3518.61,3531.67 r180 bottom
R50 "10K" RESC1005L#1 4140,2400 r180 top
R51 "10K" RESC1005L#1 4140,2360 r180 top
R52 "10K" RESC1005L#1 4140,2240 r180 top
R53 "10K" RESC1005L#1 4140,2080 r180 top
R55 "10K" RESC1005N#1 4520,2360 r180 bottom
R56 "10K" RESC1005N#1 4520,2240 r180 bottom
R57 "270R" RESC1005L#1 4140,2120 r180 top
R58 "270R" RESC1005L#1 4140,2200 r180 top
R59 "270R" RESC1005L#1 4140,2320 r180 top
R60 "270R" RESC1005L#1 3368.61,3531.67 r180 bottom
R61 "250K" RESC1005L#1 3518.61,3431.67 r0 bottom
R62 "100K" RESC1005L#1 3518.61,3381.67 r0 bottom
R63 "10K" RESC1005L#1 3368.61,3431.67 r180 bottom
R64 "82K" RESC1005L#1 3368.61,3481.67 r0 bottom
R65 "100K" RESC1005L#1 3368.61,3381.67 r0 bottom
R66 "750K" RESC1005L#1 3868.61,3531.67 r180 bottom
R67 "270R" RESC1005L#1 3718.61,3531.67 r180 bottom
R68 "250K" RESC1005L#1 3868.61,3431.67 r0 bottom
R69 "100K" RESC1005L#1 3868.61,3381.67 r0 bottom
R70 "10K" RESC1005L#1 3718.61,3431.67 r180 bottom
R71 "82K" RESC1005L#1 3718.61,3481.67 r0 bottom
R72 "100K" RESC1005L#1 3718.61,3381.67 r0 bottom
R73 "750K" RESC1005L#1 4218.61,3531.67 r180 bottom
R74 "270R" RESC1005L#1 4068.61,3531.67 r180 bottom
R75 "250K" RESC1005L#1 4218.61,3431.67 r0 bottom
R76 "100K" RESC1005L#1 4218.61,3381.67 r0 bottom
R77 "10K" RESC1005L#1 4068.61,3431.67 r180 bottom
R78 "82K" RESC1005L#1 4068.61,3481.67 r0 bottom
R79 "100K" RESC1005L#1 4068.61,3381.67 r0 bottom
R84 "2K" RESC1005L#1 3675,2125 r0 bottom
R85 "180K" RESC1005L#1 3675,2175 r180 bottom
R87 "10K" RESC1005N#1 4520,2320 r180 bottom
R88 "270R" RESC1005L#1 4140,2160 r180 top
R89 "270R" RESC1005L#1 4140,2440 r180 top
R90 "22R" RESC1005L#1 2160,2700 r270 bottom
R91 "22R" RESC1005L#1 2200,2700 r270 bottom
R92 "22R" RESC1005L#1 2120,2700 r270 bottom
R100 "10K" RESC1005L#1 2650,2125 r90 top
S1 "SW_IT_1102US10" "IT-1102US10 -1.5mm" 3700,1650 r0 top
S2 "SW_IT_1102US10" "IT-1102US10 -1.5mm" 4100,1650 r0 top
S3 "SW_IT_1102US10" "IT-1102US10 -1.5mm" 2500,1650 r0 top
S4 "SW_IT_1102US10" "IT-1102US10 -1.5mm" 2900,1650 r0 top
S5 "SW_IT_1102US10" "IT-1102US10 -1.5mm" 3300,1650 r0 top
S6 "TS-1143S-WP" TS-1143S 2500,1800 r0 bottom
SD1 "MicroSD Slot" TF-CARD 4650,2300 r90 top locked
SP2 "Alternate part: 3100-932" BUZZER_12.0X8.5MM 3800,2300 r180 top locked
U1 "LPC1769FBD100" SOT407-1_V 2950,2550 r90 top locked
U4 "REG1117-3.3" TI-DCY4_N 4100,1925 r0 bottom
U5 "74LVC1G04" SC70-LT5_N 2000,2690 r180 bottom
U6 "LAN8720A-CP" QFN-MJ24 2100,2510 r90 bottom
U8 "23LC1024-I/ST" MCHP-TSSOP-ST8_N 4400,2300 r270 bottom
U9 "MCP6022" TSSOP-ST8_N 3443.61,3481.67 r0 top
U10 "MCP6022" TSSOP-ST8_N 3793.61,3481.67 r0 top
U11 "MCP6022" TSSOP-ST8_N 4143.61,3481.67 r0 top
Y1 "12MHz" 4SMD 3450,2165 r270 top (schematic designator Y3)
Y2 "32.768kHz" 9HT7-32.768KDZF-T 2850,2125 r180 top
Y3 "25MHz" 4SMD 2100,2220 r0 bottom

## Footprints (in the part's own frame and the unit in brackets; to place one, negate y for a bottom-side part, rotate by r counter-clockwise, add the part's x,y. Pads: shape width x height; smd on the part's side, far side on the other; paste and mask are expansions set on the pad)
4-PLCC [mil] "LED_RGB"
  rect 35x59 smd: B(-28.5,-61) G(28.5,-61) R(-28.5,61) VCC(28.5,61)
  silkscreen extent -60,-100 60,100
4SMD [mm] "CCrystal"
  rect 2x1.2 smd: 1(-1.85,-1.1) 2(1.85,-1.1) 3(1.85,1.1) 4(-1.85,1.1)
  silkscreen extent -3.05,-2.03 3.05,2.03
9HT7-32.768KDZF-T [mm]
  rect 1.2x0.6 smd: 1(-3.15,-0.45) 2(3.15,-0.45) 3(3.15,0.45) 4(-3.15,0.45)
  silkscreen extent -4.06,-1.02 4.06,1.02
BU2032SM [mil]
  rrect25% 130x170 smd: 1(-575,0) 2(575,0)
  silkscreen extent -675,-315 675,315, body extent -650,-98 650,98, height 156
BUZZER_12.0X8.5MM [mil]
  round 20 on Mech14: 0(0,0)
  rrect25% 72x72 / inner rrect25% 72x72 / far side rrect25% 90x90 hole 38: 1(-127.95,0)
  round 72 / inner round 72 / far side round 90 hole 38: 2(127.95,0)
  silkscreen extent -236,-236 236,236, body extent -246,-246 246,246, height 354
CAPC1005L#1 [mm] "Chip Capacitor, Body 1.0x0.5mm, IPC High Density"
  rect 0.6x0.5 smd: 1(-0.5,0) 2(0.5,0)
  silkscreen extent -1.1,-0.15 -1.1,0.15, body extent -0.55,-0.3 0.55,0.3, height 0.6
CAPC1005L#2 [mm] "Chip Capacitor, Body 1.0x0.5mm, IPC High Density"
  rect 0.6x0.5 smd: 1(0.5,0) 2(-0.5,0)
  body extent -0.55,-0.3 0.55,0.3, height 0.6
CAPC1005N [mm] "Chip Capacitor, Body 1.0x0.5mm, IPC Medium Density"
  rect 0.8x0.6 smd: 1(-0.6,0) 2(0.6,0)
  silkscreen extent -1.3,-0.2 -1.3,0.2, body extent -0.55,-0.3 0.55,0.3, height 0.6
CAPC1608N#1 [mm] "Chip Capacitor, Body 1.6x0.8mm, 0603, IPC Medium Density"
  round 0.254 on Mech14: 0(0,0)
  rrect25% 0.9x1 smd: 1(-0.85,0) 2(0.85,0)
  Component Side pour cut-out: -0.4,0.6 0.4,0.6 0.4,-0.6 -0.4,-0.6
  silkscreen extent -0.18,-0.48 0.18,0.48, body extent -0.85,-0.45 0.85,0.45, height 0.89
CAPC1608N#2 [mm] "Chip Capacitor, Body 1.6x0.8mm, IPC Medium Density"
  rect 1x1 smd: 1(-0.8,0) 2(0.8,0)
  silkscreen extent -1.6,-0.4 -1.6,0.4, body extent -0.87,-0.48 0.87,0.48, height 0.85
CAPC2012N [mm] "Chip Capacitor, Body 2.0x1.2mm, 0805, IPC Medium Density"
  round 0.254 on Mech14: 0(0,0)
  rrect25% 1x1.4 smd: 1(-0.9,0) 2(0.9,0)
  Component Side pour cut-out: -0.4,0.8 0.4,0.8 0.4,-0.8 -0.4,-0.8
  silkscreen extent -0.15,-0.65 0.15,0.65, body extent -1.1,-0.72 1.1,0.73, height 1.34
CAPC3216N [mm] "Chip Capacitor, Body 3.2x1.6mm, IPC Medium Density"
  rect 1.3x1.8 smd: 1(-1.45,0) 2(1.45,0)
  silkscreen extent -0.4,-0.8 0.4,0.8, body extent -1.7,-0.9 1.7,0.9, height 1.35
CAPC3225N [mm] "Chip Capacitor, Body 3.2x2.5mm, 1210, IPC Medium Density"
  round 0.508 on Mech14: 0(0,0)
  rrect25% 1.15x2.7 smd: 1(-1.5,0) 2(1.5,0)
  silkscreen extent -0.4,-1.3 0.4,1.3, body extent -1.8,-1.4 1.8,1.4, height 2.19
HDR1X16 [mm] "Connector; Header; 16 Position"
  rect 1.5x1.5 hole 0.9: 1(0,0)
  round 1.5 hole 0.9: 2(2.54,0) 3(5.08,0) 4(7.62,0) 5(10.16,0) 6(12.7,0) 7(15.24,0) 8(17.78,0) 9(20.32,0) 10(22.86,0) 11(25.4,0) 12(27.94,0) 13(30.48,0) 14(33.02,0) 15(35.56,0) 16(38.1,0)
  silkscreen extent -1.27,-1.27 39.37,1.27
"HDR2X3 - duplicate-6-line 90 der" [mm]
  rect 1.5x1.5 hole 0.9: 1(0,0)
  round 1.5 hole 0.9: 2(2,0) 3(4,0) 4(0,2) 5(2,2) 6(4,2)
  silkscreen extent -2.95,-1.22 6.98,11.78
"Header 7X2-1.27" [mm] "Connector; Header; 7x2 ,1.27mm"
  rect 0.74x2.4 smd: 1(-3.815,-1.995) 2(-3.815,1.905) 3(-2.545,-1.995) 4(-2.545,1.905) 5(-1.275,-1.995) 6(-1.275,1.905) 7(-0.005,-1.995) 8(-0.005,1.905) 9(1.265,-1.995) 10(1.265,1.905) 11(2.535,-1.995) 12(2.535,1.905) 13(3.805,-1.995) 14(3.805,1.905)
  silkscreen extent -4.45,-1.7 4.58,1.7, body extent -4.45,-2.75 4.58,2.75, height 4.68
"IT-1102US10 -1.5mm" [mm]
  rect 1.4x4.6 smd: 1(-2.125,4.35) 2(2.125,4.35)
  rect 2x1.6 smd: 3(-4,0.8) 3(4,0.8)
  rect 3x1 hole 0.6 square unplated: 3(0,0)
  body extent -2.45,2.45 2.48,6.28, height 0.3
J3011G21DNL [mil]
  rrect25% 32x181 smd: 1(259,500) 2(187,500) 11(-187,500) 12(-259,500)
  rrect25% 24x181 smd: 3(140,500) 4(100,500) 5(60,500) 6(20,500) 7(-20,500) 8(-60,500) 9(-100,500) 10(-140,500)
  round 128 hole 128 unplated: MH1(250,-284.5) MH2(-250,-284.5)
  rrect25% 98x154 smd: MH1(341.5,-284.5) MH2(-341.5,-284.5)
  silkscreen extent -317,-500 317,600, body extent -340,-500 340,500, height 156
LED-0603-GREEN [mm]
  round 0.254 on Mech14: 0(0,0)
  rrect25% 0.8x0.8 smd: A(-0.85,0) K(0.85,0)
  Component Side pour cut-out: -0.5,0.5 0.5,0.5 0.5,-0.5 -0.5,-0.5
  silkscreen extent -1.55,-0.67 1.68,0.67, body extent -0.8,-0.4 0.8,0.4, height 0.75
MCHP-TSSOP-ST8_N [mm] "SOP, 8-Leads, Body 4.4x3mm, Pitch 0.65mm, IPC Medium Density"
  oval 1.55x0.35 smd: 1(-2.875,0.975) 2(-2.875,0.325) 3(-2.875,-0.325) 4(-2.875,-0.975) 5(2.875,-0.975) 6(2.875,-0.325) 7(2.875,0.325) 8(2.875,0.975)
  silkscreen extent -3,-1.55 1.7,1.82, body extent -2.25,-1.55 2.25,1.55, height 1.2
QFN-MJ24 [mm] "QFN, 24-Leads, Body 4x4mm, Pitch 0.5mm, Thermal Pad 2.6x2.6mm, Microchip Recommended"
  rect 0.85x0.3 smd: 1(-1.95,1.25) 2(-1.95,0.75) 3(-1.95,0.25) 4(-1.95,-0.25) 5(-1.95,-0.75) 6(-1.95,-1.25) 13(1.95,-1.25) 14(1.95,-0.75) 15(1.95,-0.25) 16(1.95,0.25) 17(1.95,0.75) 18(1.95,1.25)
  rect 0.3x0.85 smd: 7(-1.25,-1.95) 8(-0.75,-1.95) 9(-0.25,-1.95) 10(0.25,-1.95) 11(0.75,-1.95) 12(1.25,-1.95) 19(1.25,1.95) 20(0.75,1.95) 21(0.25,1.95) 22(-0.25,1.95) 23(-0.75,1.95) 24(-1.25,1.95)
  rect 2.6x2.6 smd paste-1.3: 25(0,0)
  silkscreen extent -2.9,-2.22 2.22,2.22, body extent -2.07,-2.07 2.07,2.07, height 0.9
RES_TRIMMER_SMD_TC33X1 [mm]
  rect 1.2x1.2 smd: 1(-0.991,-1.854) 3(1.009,-1.854)
  rect 1.6x1.5 smd: 2(0.009,1.446)
  silkscreen extent -1.79,-1.85 1.81,1.85
RESC1005L#1 [mm] "Chip Resistor, Body 1.1x0.5mm, IPC High Density"
  rect 0.6x0.6 smd: 1(-0.5,0) 2(0.5,0)
  body extent -0.55,-0.3 0.55,0.3, height 0.4
RESC1005L#2 [mm] "Chip Resistor, Body 1.1x0.5mm, IPC High Density"
  rect 0.6x0.6 smd: 1(0.5,0) 2(-0.5,0)
  body extent -0.55,-0.3 0.55,0.3, height 0.4
RESC1005l [mm] "Chip Resistor, Body 1.1x0.5mm, IPC High Density"
  rect 0.6x0.6 smd: 1(-0.5,0) 2(0.5,0)
  body extent -0.55,-0.3 0.55,0.3, height 0.4
RESC1005N#1 [mm] "Chip Resistor, Body 1.0x0.5mm, EIA 0402, IPC Medium Density"
  round 0.2 on Mech14: 0(0,0)
  rrect20% 0.6x0.6 smd: 1(-0.5,0) 2(0.5,0)
  Component Side pour cut-out: -0.2,0.35 0.2,0.35 0.2,-0.35 -0.2,-0.35
  silkscreen extent -1.05,-0.55 1.05,0.55, body extent -0.52,-0.27 0.53,0.28, height 0.4
RESC1005N#2 [mm] "Chip Resistor, Body 1.1x0.5mm, IPC Medium Density"
  rect 0.8x0.7 smd: 1(-0.6,0) 2(0.6,0)
  body extent -0.55,-0.3 0.55,0.3, height 0.4
SC70-LT5_N [mm] "SOT353, 5-Leads, Body 2x1.3mm, Pitch 0.65mm, Lead Span 2.1mm, IPC Medium Density"
  rect 0.85x0.4 smd: 1(-0.95,0.65) 2(-0.95,0) 3(-0.95,-0.65) 4(0.95,-0.65) 5(0.95,0.65)
  silkscreen extent -1.07,-1.15 0.15,1.52, body extent -0.67,-1.12 0.68,1.13, height 1.1
SOD323 [mm] "SOD-323/SC-76; 2 Leads; Body 1.7 x 1.3 mm, (LxW)"
  rect 1.45x0.55 smd: 1(1.175,0) 2(-1.175,0)
  silkscreen extent -0.95,-0.75 0.95,0.75
SOD523F [mm] "SOD-523F; 2 Leads; Body 1.3 x 0.9 mm, (LxW)"
  round 0.508 on Mech14: 0(0,0)
  rrect20% 0.65x0.5 smd: A(0.9,0) K(-0.9,0)
  silkscreen extent -1.02,-0.77 0.25,0.51, body extent -0.85,-0.45 0.85,0.45, height 0.7
SOT23-3N [mm] "SOT23, 3-Leads, Body 2.9x1.3mm, Pitch 0.95mm, Lead Span 2.5mm, IPC Medium Density"
  rect 1.5x0.6 smd: 1(-0.95,0.95) 2(-0.95,-0.95) 3(0.95,0)
  silkscreen extent -1.07,-1.5 0.7,1.92, body extent -0.7,-1.5 0.7,1.5, height 1.1
SOT190P230X120-4N [mm] "SOT143, 4-Leads, Body 2.9x1.3mm, Pitch 1.9mm, Lead Span 2.3mm, IPC Medium Density"
  rect 1x1.05 smd: 1(-1.125,0.75)
  rect 1x0.65 smd: 2(-1.125,-0.95) 3(1.125,-0.95) 4(1.125,0.95)
  silkscreen extent -1.47,-1.5 0.4,1.95, body extent -0.7,-1.52 0.7,1.52, height 1.2
SOT407-1_V [mm] "Thin QFP, 100-Leads, Body 14x14mm, Pitch 0.5mm, NXP Recommended"
  rect 1.5x0.4 smd: 1(-7.9,6.06) 25(-7.9,-6.06) 51(7.9,-6.06) 75(7.9,6.06)
  rect 1.5x0.28 smd: 2(-7.9,5.5) 3(-7.9,5) 4(-7.9,4.5) 5(-7.9,4) 6(-7.9,3.5) 7(-7.9,3) 8(-7.9,2.5) 9(-7.9,2) 10(-7.9,1.5) 11(-7.9,1) 12(-7.9,0.5) 13(-7.9,0) 14(-7.9,-0.5) 15(-7.9,-1) 16(-7.9,-1.5) 17(-7.9,-2) 18(-7.9,-2.5) 19(-7.9,-3) 20(-7.9,-3.5) 21(-7.9,-4) 22(-7.9,-4.5) 23(-7.9,-5) 24(-7.9,-5.5) 52(7.9,-5.5) 53(7.9,-5) 54(7.9,-4.5) 55(7.9,-4) 56(7.9,-3.5) 57(7.9,-3) 58(7.9,-2.5) 59(7.9,-2) 60(7.9,-1.5) 61(7.9,-1) 62(7.9,-0.5) 63(7.9,0) 64(7.9,0.5) 65(7.9,1) 66(7.9,1.5) 67(7.9,2) 68(7.9,2.5) 69(7.9,3) 70(7.9,3.5) 71(7.9,4) 72(7.9,4.5) 73(7.9,5) 74(7.9,5.5)
  rect 0.4x1.5 smd: 26(-6.06,-7.9) 50(6.06,-7.9) 76(6.06,7.9) 100(-6.06,7.9)
  rect 0.28x1.5 smd: 27(-5.5,-7.9) 28(-5,-7.9) 29(-4.5,-7.9) 30(-4,-7.9) 31(-3.5,-7.9) 32(-3,-7.9) 33(-2.5,-7.9) 34(-2,-7.9) 35(-1.5,-7.9) 36(-1,-7.9) 37(-0.5,-7.9) 38(0,-7.9) 39(0.5,-7.9) 40(1,-7.9) 41(1.5,-7.9) 42(2,-7.9) 43(2.5,-7.9) 44(3,-7.9) 45(3.5,-7.9) 46(4,-7.9) 47(4.5,-7.9) 48(5,-7.9) 49(5.5,-7.9) 77(5.5,7.9) 78(5,7.9) 79(4.5,7.9) 80(4,7.9) 81(3.5,7.9) 82(3,7.9) 83(2.5,7.9) 84(2,7.9) 85(1.5,7.9) 86(1,7.9) 87(0.5,7.9) 88(0,7.9) 89(-0.5,7.9) 90(-1,7.9) 91(-1.5,7.9) 92(-2,7.9) 93(-2.5,7.9) 94(-3,7.9) 95(-3.5,7.9) 96(-4,7.9) 97(-4.5,7.9) 98(-5,7.9) 99(-5.5,7.9)
  silkscreen extent -8.02,-6.75 6.75,6.93, body extent -7,-7 7,7, height 1.6
TF-CARD [mm]
  rect 0.7x1.6 smd: 1(3.2,10.5) 2(2.1,10.5) 3(1,10.5) 4(-0.1,10.5) 5(-1.2,10.5) 6(-2.3,10.5) 7(-3.4,10.5) 8(-4.5,10.5) 9(-5.6,10.5)
  rect 1.2x1.4 smd: 10(-7.125,10)
  rect 1.2x2.2 smd: 11(-7.125,0.4) 13(8.375,0.4)
  rect 1.4x1.6 smd: 12(7.475,10)
  round 1 hole 1 unplated: 14(-4,0) 15(4,0)
  silkscreen extent -6.28,-4.5 8.13,10.15, body extent -6.28,-4.5 8.1,10.15, height 1.8
TI-DCY4_N [mm] "SOT223, 4-Leads, Body 6.5x3.5mm, Pitch 2.3mm, IPC Medium Density"
  rect 1.85x1 smd: 1(-3.175,2.3) 2(-3.175,0) 3(-3.175,-2.3)
  rect 1.85x3.2 smd: 4(3.175,0)
  silkscreen extent -3.3,-3.35 1.95,3.47, body extent -1.85,-3.35 1.85,3.35, height 1.8
TS-1143S [mm] "6.5x6.5mm SMD tact switch 4.3mm stem"
  round 0.508 on Mech14: 0(0,0)
  rrect25% 1.4x1 smd: 1(-3.75,2.25) 1(3.75,2.25) 2(-3.75,-2.25) 2(3.75,-2.25)
  silkscreen extent -2.79,-3.35 2.79,3.35, body extent -4,-3.25 4,3.25, height 4.3
TSSOP-ST8_N [mm] "TSOP, 8-Leads, Body 3x4.4mm, Pitch 0.65mm, IPC Medium Density"
  oval 1.7x0.35 smd: 1(-2.85,0.975) 2(-2.85,0.325) 3(-2.85,-0.325) 4(-2.85,-0.975) 5(2.85,-0.975) 6(2.85,-0.325) 7(2.85,0.325) 8(2.85,0.975)
  silkscreen extent -2.97,-1.55 1.6,1.82, body extent -2.25,-1.55 2.25,1.55, height 1.2
USB_micoi-B_Molex_SMT [mm]
  rect 1.38x0.45 smd: 1(4.826,1.3) 2(4.826,0.65) 3(4.826,0) 4(4.826,-0.649) 5(4.826,-1.299)
  rect 1.9x2.375 smd: MH1(2.166,-2.912) MH4(2.166,2.913)
  rect 2.1x1.475 smd: MH2(4.466,-2.462) MH3(4.464,2.463)
  rect 1.9x1.175 smd: ""(2.166,-0.837) ""(2.166,0.837)
  silkscreen extent 0.01,-4.1 6.46,4.1, body extent 0.11,-3.28 4.83,3.3, height 3.95

## Part data
BT1: "Multicell Battery"
C1 C2 C3 C4 C6 C7 C9 C10 C12 C13 C17 C18 C19 C20 C21 C22 C23 C24 C25 C26 C27 C28 C29 C30 C31 C33 C34 C35 C36 C37 C38 C41 C43 C45 C66: library part CAPC_100n_0805, "Capacitor SMD"
C5 C14 C32: library part CAPC_100n_0805, "Capacitor SMD Cer 100nF 10% 50V X7R 0805"
C8 C16: library part CAPT_100u_1210_6V3, "Capacitor SMD Tantalum 100uF 20% 6.3V 1210"
C11 C15: library part CAPC_100n_0805, "Capacitor SMD X7R"
C40 C42 C44: "Capacitor SMD"
C64: library part CAPC_100n_0402, "Capacitor SMD"
C65: library part CAPT_1u_0805_10V, "Capacitor SMD Tantalum 1uF 20% 10V 0805"
C67 C68 C69 C73 C75: library part CAPC_100n_0402, "Capacitor SMD Cer 100nF 10% 50V X7R 0805"
C70 C71 C72 C74: library part CAPC_10n_0402_16V_10%, "Capacitor SMD Cer 10nF 10% 16V X7R 0402"
D2 D3 D4 D5 D6 D7 D11: library part "Diode 1N4448", "High Conductance Fast Diode"
D8 D9 D10: library part DIODE_1N4148_200mA_SOD523F, "Diode SMD small signal 0.2A SOD-523F"
FB1 FB3: library part RES_10K_0805_5%, "Resistor SMD chip 10k Ohm 0.125W 5% 0805"
FB2 R13 R30 R37 R53 R89: library part RES_330R_0402_5%, "Resistor SMD chip 330 Ohm 0.063W 5% 0402"
J2: library part "Pulse Electronics Corporation", "10/100 Base-Tx Tap Up RJ45 with LED"
J3: "Connector SMD USB Type Mico-B"
LED2: library part LED_SMD_Green_0805_8mcd, "LED, 0805 SMD, Green"
LED3: library part LED_SMD_Red_0805, "LED, 0805 SMD, Red"
P2: "Header, 16-Pin"
P3: library part "Header 7X2_1.27", "Header, 7-Pin, Dual row"
Q1 Q7: "PNP General Purpose Transistors"
Q5 Q6: "P-Channel MOSFET"
R1 R2 R3 R4 R5 R6 R7 R10 R12 R14 R15 R16 R21 R22 R25 R26 R27 R28 R29 R34 R50 R51 R52 R55 R56 R57 R59 R85 R88 R90 R91 R92: library part RES_330R_0402_5%, "Resistor SMD chip"
R8 R9 R11 R58 R87: library part RES_330R_0402_5%, "Resistor SMD"
R17: "Trimmer SMD 10K 250mW 5-turn Side-adjust"
R18 R19 R20 R23 R31 R32 R33 R35 R36 R39 R41 R43 R84 R100: library part RES_10K_0805_5%, "Resistor SMD chip"
R24: library part RES_470R_0603_5%, "Resistor SMD chip"
R44 R60 R61 R62 R63 R64 R65 R66 R67 R68 R69 R70 R71 R72 R73 R74 R75 R76 R77 R78 R79: library part Res1, "Resistor SMD"
S6: library part SW_SMD_PB_4.3mm, "Switch SMD Tact 4.3mm Stem"
SP2: library part BZ_12x8.5x6.5_2kHz, "Speaker, Magnetic Transducer"
U1: "32-bit ARM Cortex-M3 MCU, 512 kB Flash, 64 kB SRAM, Ethernet, USB 2.0 Device/Host/OTG, 12-Bit ADC, DAC, I2S, 100-Pin LQFP"
U4: "Single Output LDO, 800 mA, Fixed 3.3 V Output, 3.8 to 15 V Input, with Internal Current Limiting, 4-pin SOT-223 (DCY), -40 to 125 degC, Green (RoHS & no Sb/Br)"
U8: "1024K bits SPI Serial SRAM with SDI and SQI Interface, 2.5 to 5.5 V, 20 MHz, -40 to 85 degC, 8-pin TSSOP (ST8), Tube"
Y1 Y3: library part CRYSTAL_27M12, "Oscillator Crystal 27.12 MHz 10ppm"
Y2: library part CRYSTAL, "Oscillator Crystal"

## Free pads (board coordinates)
  round 180 hole 120: GND(1629.53,1863.78) GND(1629.53,3084.25) GND(4582.28,1863.78) GND(4582.28,3084.25)

## Via types
v1: diameter 10, hole 8, Component Side to Inner Layer 1, 119 vias
v2: diameter 10, hole 8, Component Side to Solder Side, 117 vias
v3: diameter 10, hole 8, Inner Layer 2 to Solder Side, 62 vias
v4: diameter 19.68, hole 7.87, Component Side to Solder Side, 5 vias

## Nets (pads, with @x,y where several pads share a name; then routed paths per layer and width w, separated by ;. In a path a pad name is that pad's centre, name@x,y a point inside that pad or via, vN(x,y) a via of type N, cw(c..) or ccw(c..) an arc to the next point about the centre after c; other vN are vias at no path point)
3V3: C1.1 C15.2 C16.1 C17.1 C19.1 C28.1 C29.1 C36.1 C37.1 C38.1 C41.1 C43.1 C45.1 C64.1 C65.1 C66.1 C67.2 C68.2 C69.2 C70.2 C71.2 C72.2 D2.2 D4.2 D6.2 D9.A FB1.2 FB2.2 J2.5 J2.6 LED1.VCC P3.1 Q1.2 Q5.2 Q6.2 R6.1 R7.1 R17.3 R21.2 R23.2 R24.2 R31.1 R32.1 R33.1 R35.1 R36.1 R50.2 R51.2 R52.2 R53.2 R55.1 R56.1 R62.2 R69.2 R76.2 R87.1 R100.1 SD1.4 U1.28 U1.42 U1.54 U1.71 U1.84 U1.96 U4.2 U4.4 U5.5 U6.9 U8.8 U9.8 U10.8 U11.8 | length 5778
  Component Side w8: U1.96@2638.98,2392.52 2638.98,2393 2672.81,2393 2792.52,2512.71 v1(2792.52,2650) ; U1.84@2638.98,2628.74 v1(2720,2628.74) ; v1@2792.52,2822.64 U1.71@2792.52,2861.02 ; U1.54@3127.17,2861.02 3127.17,2432.83 3206.85,2353.15 U1.28@3261.02,2353.15 ; v1(3180,2628.74) U1.42@3261.02,2628.74 ; v2(3225,1975) 3240,1990 D9.A@3240,2044.57 ; FB1.2@3431.5,2490 3490,2490 3500,2500 v2(3500,2600) ; C36.1@3463.29,3306.67 3493.61,3306.67 3514.87,3285.41 v2(3543.61,3285.41) ; C37.1@3813.29,3306.67 3843.61,3306.67 3864.87,3285.41 v2(3893.61,3285.41) ; C38.1@4163.29,3306.67 4193.61,3306.67 4214.87,3285.41 v2(4243.61,3285.41)
  Component Side w10: v2(3360.31,2620) v1(3360.31,2660) ; v2(3360.31,2700) v1(3360.31,2740) ; v2(3360.31,2780) v1(3360.31,2820) ; C65.1@4140,2502.91 4257.09,2502.91 4300,2460 4300,2300 4296.06,2296.06 4191.06,2296.06 4175,2280 v2(4159.69,2280) ; LED1.VCC@4605.44,1671.5 v2(4611,1671.5)
  Inner Layer 1 w8: v1(2720,2628.74) v1(3180,2628.74) 3258.74,2628.74 3290,2660 v1(3360.31,2660) ; v1(2792.52,2650) 2792.52,2740 ; v1(2792.52,2820) 2792.52,2740 ; v1(3127.17,2800) 3270,2800 3290,2820 3360,2820 v1(3360.31,2820) ; v1(3360.31,2740) 2792.52,2740
  Solder Side w8: v3(3180.32,1919.68) R33.1@3300,1919.68 R32.1@3340,1919.68 R31.1@3380,1919.68 R36.1@3420,1919.68 R35.1@3460,1919.68 ; C41.1@3479.04,3306.67 3538.29,3306.67 ; R62.2@3538.29,3381.67 3538.29,3306.67 ; v2(3543.61,3285.41) 3543.61,3301.36 3538.29,3306.67 ; C43.1@3829.04,3306.67 3888.29,3306.67 ; R69.2@3888.29,3381.67 3888.29,3306.67 ; v2(3893.61,3285.41) 3893.61,3301.36 3888.29,3306.67 ; C45.1@4179.04,3306.67 4238.29,3306.67 ; R76.2@4238.29,3381.67 4238.29,3306.67 ; v2(4243.61,3285.41) 4243.61,3301.36 4238.29,3306.67 ; C64.1@4500.31,2279.37 v3(4539.69,2240) ; v3(4500.31,2280) v3(4539.69,2319.37) R87.1@4539.69,2320 v3(4539.69,2360)
  Solder Side w10: v3(1860,2425.43) 1895.43,2425.43 1910,2440 1910,2479.84 1930.31,2500.16 U6.9@2023.23,2500.16 ; C19.1@1879.68,2480 1910,2480 ; C1.1@1879.68,2720 1920,2720 v3(1924.41,2715.59) U5.5@1962.6,2715.59 ; v2(2400,2490) C28.1@2430.32,2490 ; v2(2400,2530) C29.1@2430.32,2530 ; U4.4@4225,1925 4300,1850 C15.2@4330.31,1850
  Solder Side w30: C16.1@3809.06,1850 v3(3850,1850) v3(3925,1925) v3(3975,1925) U4.4@4225,1925
  other v2: 1769.69,1700 2287.4,1987.4 4120.31,2080 2650,2105.32 4120.31,2240 4120.31,2360 4120.31,2400
  other v3: 3875,1875 4200,1875 4250,1875 3900,1900 4225,1900 4050,1925 4100,1925 4150,1925 4200,1925 4250,1925 4225,1950 4200,1975 4250,1975 4361.61,2186.81 1840.32,2520 1840.32,2640 1700,2700 1728.54,2700.2 1750,2700 2260,2731.5 2110.26,2877 1912.6,2912.6 3212.6,2912.6
AD0_0: R60.2 U1.9 | length 2050.7
  Component Side w6: U1.9@2871.26,2238.98 v2(2871.26,2360)
  Inner Layer 2 w6: v2(2871.26,2360) 2871.26,2431.26 3550,3110 3550,3200 3500,3250 3250,3250 3225,3275 3225,3550 3249.91,3574.91 v2(3348.92,3574.91)
  Solder Side w8: R60.2@3348.92,3531.67 v2(3348.92,3574.91)
AD0_1: R67.2 U1.8 | length 2515
  Component Side w6: U1.8@2851.57,2238.98 v2(2851.57,2340)
  Inner Layer 2 w6: v2(2851.57,2340) 2851.57,2451.57 3500,3100 3500,3200 3475,3225 3225,3225 3175,3275 3175,3575 3250,3650 3623.83,3650 v2(3698.92,3574.91)
  Solder Side w8: R67.2@3698.92,3531.67 v2(3698.92,3574.91)
AD0_2: R74.2 U1.7 | length 2973.2
  Component Side w6: U1.7@2831.89,2238.98 v2(2831.89,2360)
  Inner Layer 2 w6: v2(2831.89,2360) 2831.89,2471.89 3450,3090 3450,3175 3425,3200 3200,3200 3100,3300 3100,3625 3150,3675 3948.83,3675 v2(4048.92,3574.91)
  Solder Side w8: R74.2@4048.92,3531.67 v2(4048.92,3574.91)
AD0_4: U1.21
AD0_5: U1.20
AI_0: J1.1 R44.1 | length 1027.5
  Inner Layer 1 w8: v2(3538.29,3574.91) 3588.38,3625 4325,3625 J1.1@4450,3500
  Solder Side w8: R44.1@3538.29,3531.67 v2(3538.29,3574.91)
AI_1: J1.2 R66.1 | length 748
  Inner Layer 1 w8: v2(3888.29,3574.91) 3913.38,3600 4325,3600 4375,3550 4375,3450 4403.74,3421.26 J1.2@4450,3421.26
  Solder Side w8: R66.1@3888.29,3531.67 v2(3888.29,3574.91)
AI_2: J1.3 R73.1 | length 453.7
  Inner Layer 1 w6: v2(4238.29,3574.91) 4325.09,3574.91 4350,3550 4350,3375 4382.48,3342.52 J1.3@4450,3342.52
  Solder Side w6: R73.1@4238.29,3531.67 v2(4238.29,3574.91)
AOUT: U1.6
BTN_CENTER: R29.2 U1.43 | length 859.4
  Component Side w6: v2(3160,2648.43) U1.43@3261.02,2648.43
  Solder Side w6: v2(3160,2648.43) 3191.57,2648.43 3340,2500 3340,2060 3380,2020 R29.2@3380,1999.69
BTN_DOWN: R28.1 U1.40 | length 766.6
  Component Side w6: v2(3180,2589.37) U1.40@3261.02,2589.37
  Solder Side w6: v2(3180,2589.37) 3230.63,2589.37 3320,2500 3320,2040 3340,2020 R28.1@3340,1999.68
BTN_LEFT: R25.2 U1.44 | length 855.8
  Component Side w6: v2(3180,2668.11) U1.44@3261.02,2668.11
  Solder Side w6: v2(3180,2668.11) 3191.89,2668.11 3360,2500 3360,2080 3420,2020 R25.2@3420,1999.69
BTN_RIGHT: R26.1 U1.45 | length 932.3
  Component Side w6: v2(3160,2687.8) U1.45@3261.02,2687.8
  Solder Side w6: v2(3160,2687.8) 3192.2,2687.8 3380,2500 3380,2100 3460,2020 R26.1@3460,1999.68
BTN_UP: R27.1 U1.39 | length 770.2
  Component Side w6: v2(3160,2569.69) U1.39@3261.02,2569.69
  Solder Side w6: v2(3160,2569.69) 3230.31,2569.69 3300,2500 R27.1@3300,1999.68
CONSOLE_RXD: P3.14 U1.99 | length 1200.6
  Component Side w6: v2(1575,2400.2) 1649.8,2400.2 1822,2228 2524.97,2228 2562,2265.03 2562,2302 2593.46,2333.46 U1.99@2638.98,2333.46
CONSOLE_TXD: P3.12 U1.98 | length 1221.3
  Component Side w6: v2(1575,2450.2) 1619.8,2450.2 1830,2240 2520,2240 2550,2270 2550,2310 2593.15,2353.15 U1.98@2638.98,2353.15
ENET-CRS: R3.1 U1.92 | length 1167.4
  Component Side w6: v1(2560,2473.5) 2636.74,2473.5 U1.92@2638.98,2471.26
  Inner Layer 1 w6: v2(1840.32,2600) 1840.32,2639.68 1840,2640 2000,2800 2420,2800 2580,2640 2580,2493.5 v1(2560,2473.5)
ENET-MDC: U1.87 U6.13 | length 916.7
  Component Side w6: v1(2540,2569.69) U1.87@2638.98,2569.69
  Inner Layer 1 w6: v2(2000,2620) 2000,2680 2080,2760 2420,2760 2540,2640 v1(2540,2569.69)
  Solder Side w6: v2(2000,2620) 2033.23,2586.77 U6.13@2050.79,2586.77